# EAGLE board SparkFun_TPL5110_Breakout-Panel (EAGLE 9.4.0), part 1 of 5
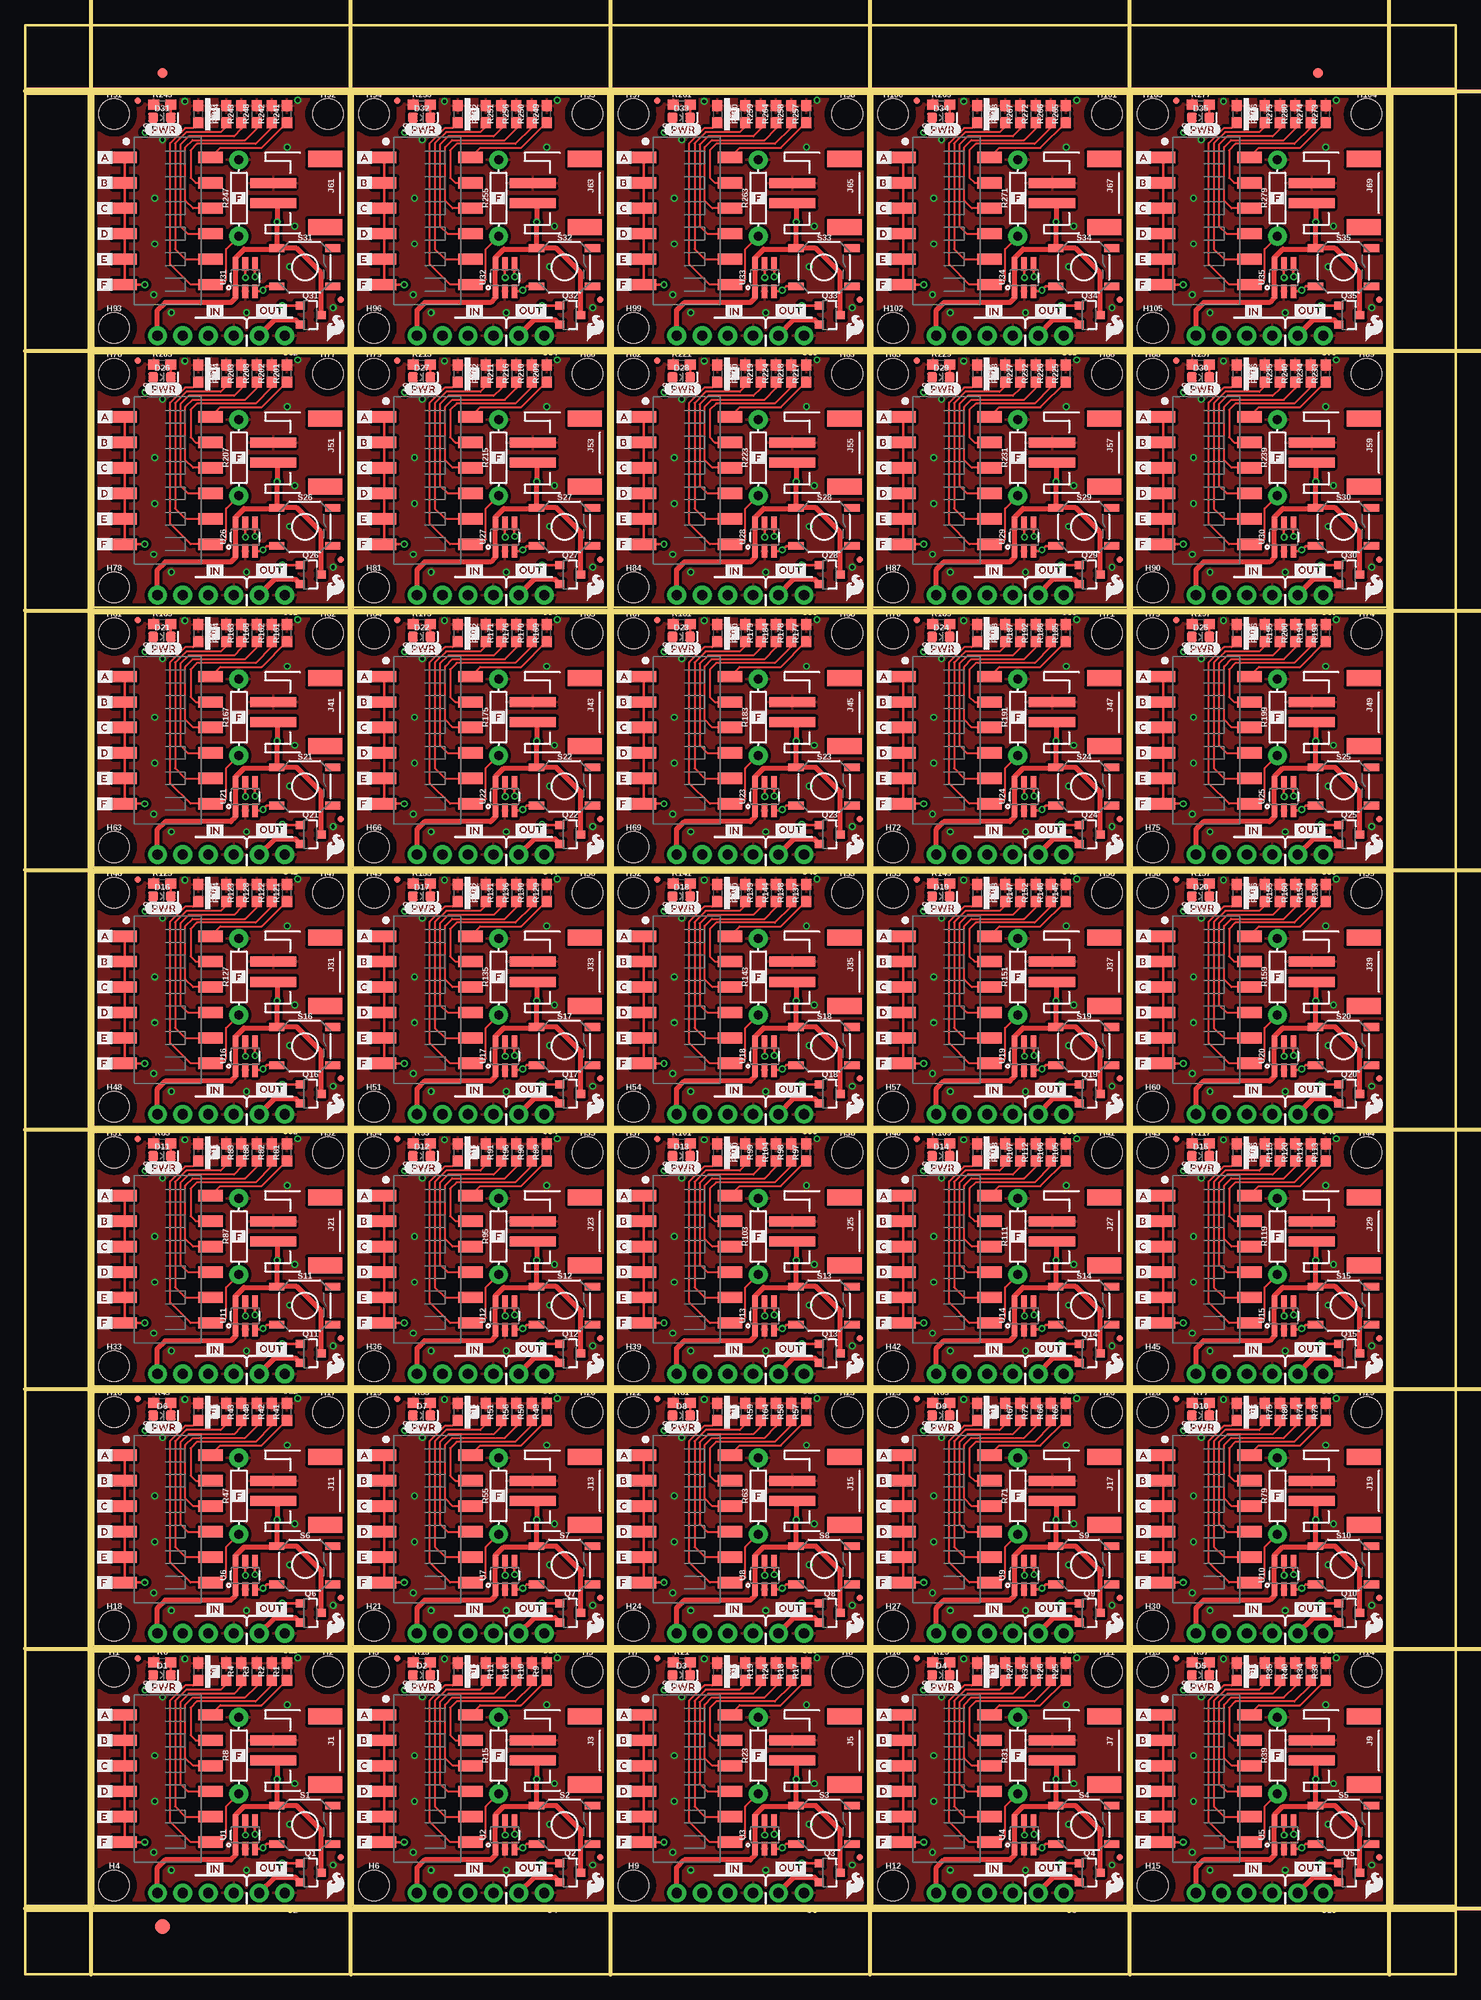
[diagram p0: board, top side]
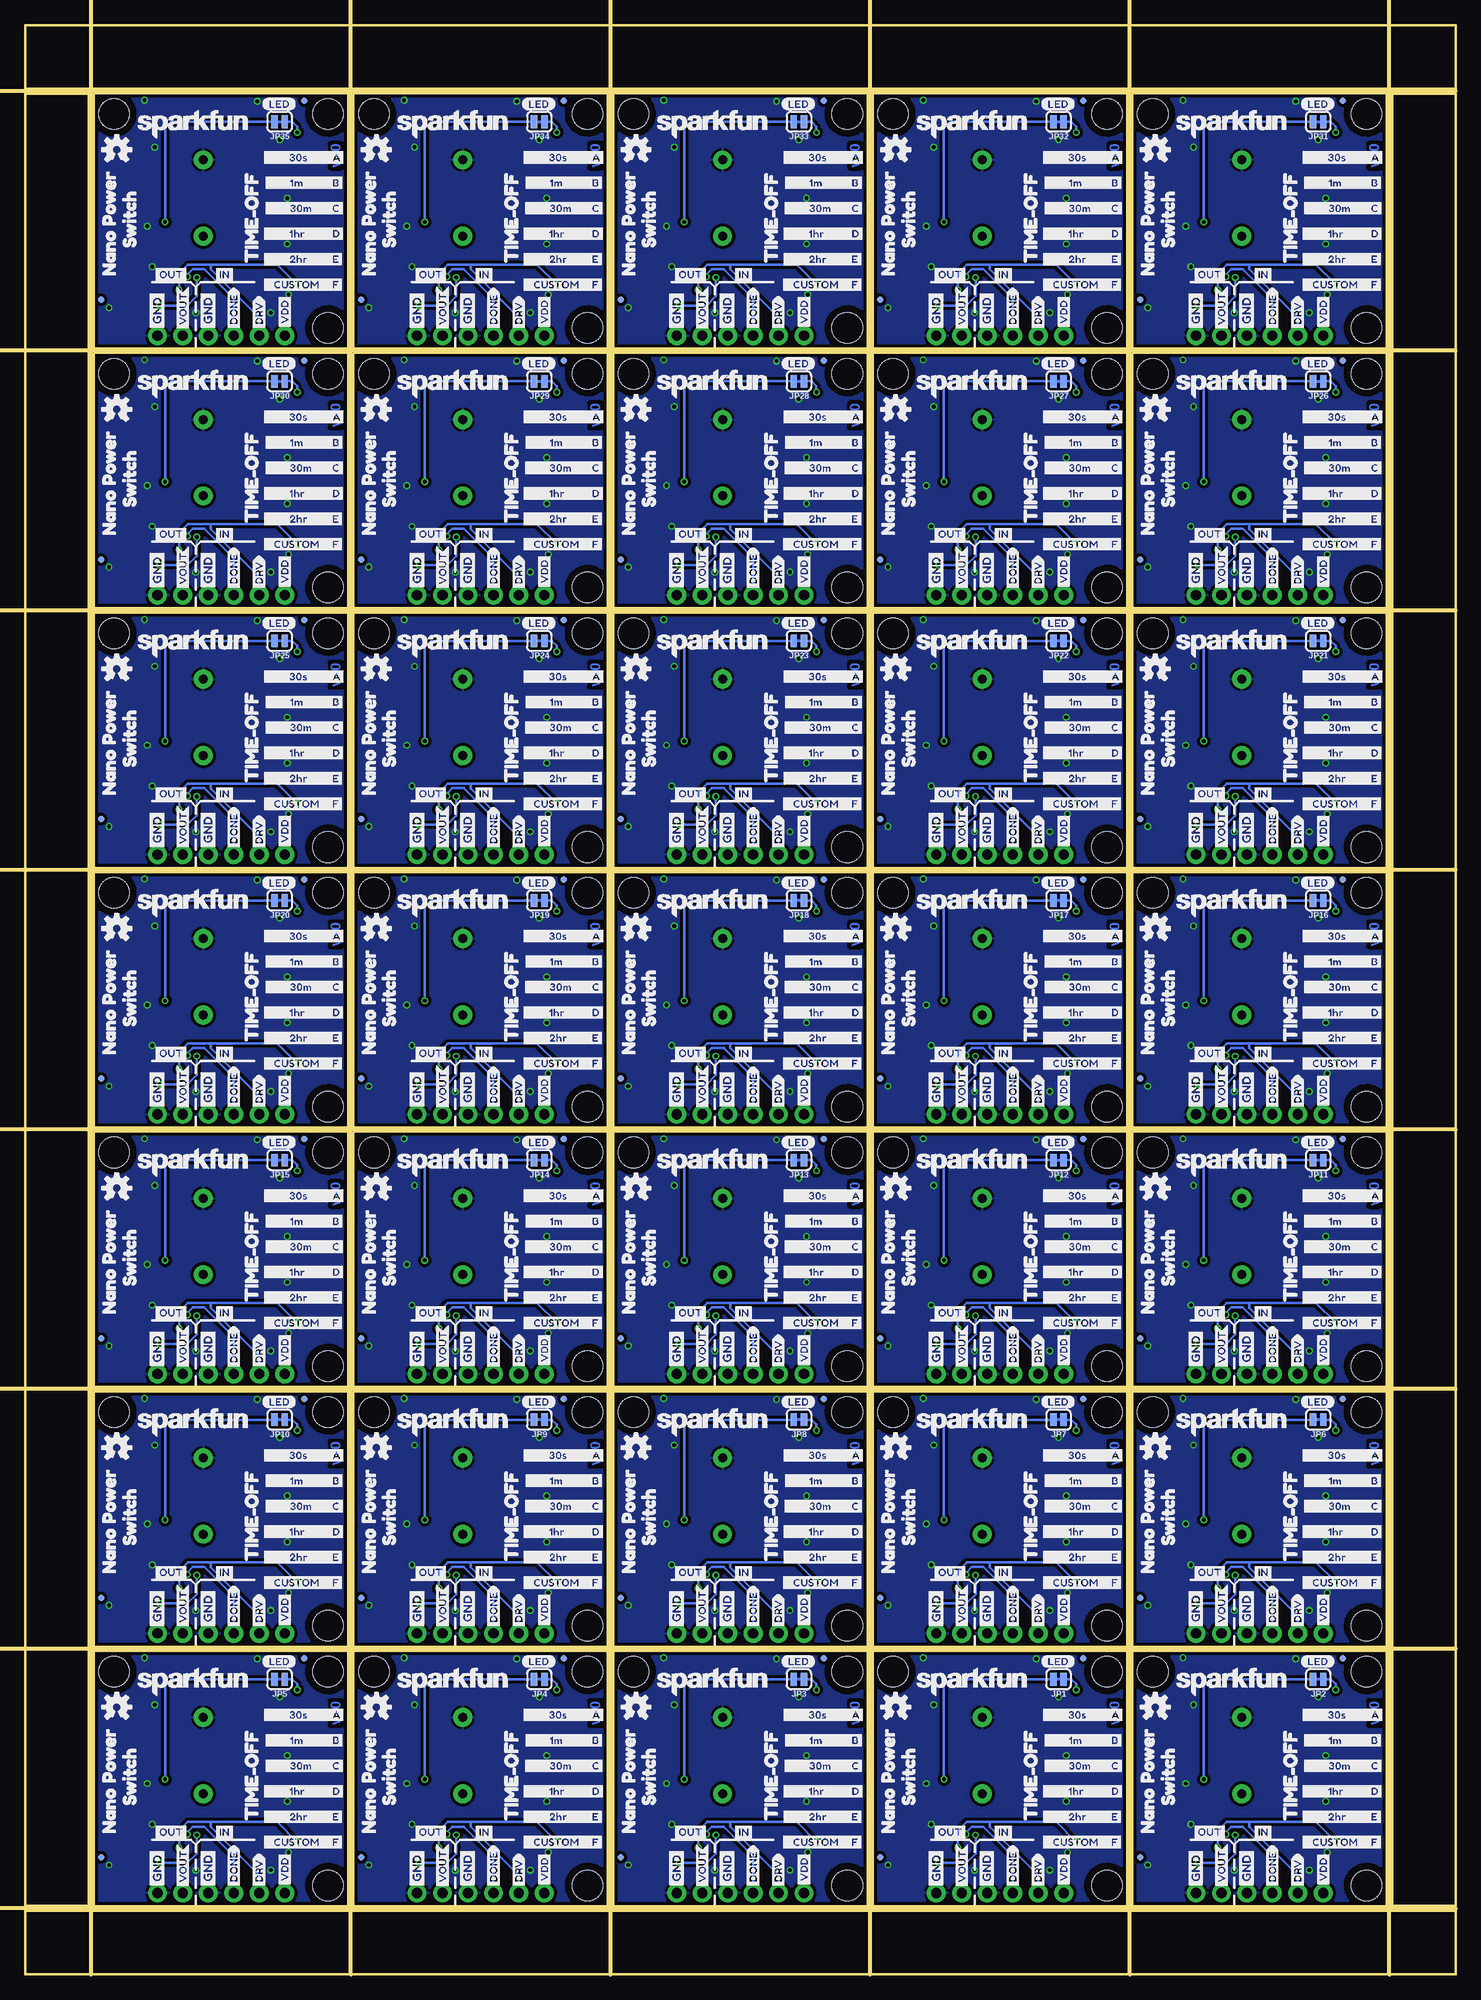
[diagram p1: board, bottom side, seen from below]

Size 142.75 x 194.56 mm. Coordinates in mm from the lower left corner, seen from the top.
Outline: 6.86,6.86 6.86,32.26 32.26,32.26 32.26,6.86 6.86,6.86
Outline: 32.77,6.86 32.77,32.26 58.17,32.26 58.17,6.86 32.77,6.86
Outline: 58.67,6.86 58.67,32.26 84.07,32.26 84.07,6.86 58.67,6.86
Outline: 84.58,6.86 84.58,32.26 109.98,32.26 109.98,6.86 84.58,6.86
Outline: 110.49,6.86 110.49,32.26 135.89,32.26 135.89,6.86 110.49,6.86
Outline: 6.86,32.77 6.86,58.17 32.26,58.17 32.26,32.77 6.86,32.77
Outline: 32.77,32.77 32.77,58.17 58.17,58.17 58.17,32.77 32.77,32.77
Outline: 58.67,32.77 58.67,58.17 84.07,58.17 84.07,32.77 58.67,32.77
Outline: 84.58,32.77 84.58,58.17 109.98,58.17 109.98,32.77 84.58,32.77
Outline: 110.49,32.77 110.49,58.17 135.89,58.17 135.89,32.77 110.49,32.77
Outline: 6.86,58.67 6.86,84.07 32.26,84.07 32.26,58.67 6.86,58.67
Outline: 32.77,58.67 32.77,84.07 58.17,84.07 58.17,58.67 32.77,58.67
Outline: 58.67,58.67 58.67,84.07 84.07,84.07 84.07,58.67 58.67,58.67
Outline: 84.58,58.67 84.58,84.07 109.98,84.07 109.98,58.67 84.58,58.67
Outline: 110.49,58.67 110.49,84.07 135.89,84.07 135.89,58.67 110.49,58.67
Outline: 6.86,84.58 6.86,109.98 32.26,109.98 32.26,84.58 6.86,84.58
Outline: 32.77,84.58 32.77,109.98 58.17,109.98 58.17,84.58 32.77,84.58
Outline: 58.67,84.58 58.67,109.98 84.07,109.98 84.07,84.58 58.67,84.58
Outline: 84.58,84.58 84.58,109.98 109.98,109.98 109.98,84.58 84.58,84.58
Outline: 110.49,84.58 110.49,109.98 135.89,109.98 135.89,84.58 110.49,84.58
Outline: 6.86,110.49 6.86,135.89 32.26,135.89 32.26,110.49 6.86,110.49
Outline: 32.77,110.49 32.77,135.89 58.17,135.89 58.17,110.49 32.77,110.49
Outline: 58.67,110.49 58.67,135.89 84.07,135.89 84.07,110.49 58.67,110.49
Outline: 84.58,110.49 84.58,135.89 109.98,135.89 109.98,110.49 84.58,110.49
Outline: 110.49,110.49 110.49,135.89 135.89,135.89 135.89,110.49 110.49,110.49
Outline: 6.86,136.4 6.86,161.8 32.26,161.8 32.26,136.4 6.86,136.4
Outline: 32.77,136.4 32.77,161.8 58.17,161.8 58.17,136.4 32.77,136.4
Outline: 58.67,136.4 58.67,161.8 84.07,161.8 84.07,136.4 58.67,136.4
Outline: 84.58,136.4 84.58,161.8 109.98,161.8 109.98,136.4 84.58,136.4
Outline: 110.49,136.4 110.49,161.8 135.89,161.8 135.89,136.4 110.49,136.4
Outline: 6.86,162.31 6.86,187.71 32.26,187.71 32.26,162.31 6.86,162.31
Outline: 32.77,162.31 32.77,187.71 58.17,187.71 58.17,162.31 32.77,162.31
Outline: 58.67,162.31 58.67,187.71 84.07,187.71 84.07,162.31 58.67,162.31
Outline: 84.58,162.31 84.58,187.71 109.98,187.71 109.98,162.31 84.58,162.31
Outline: 110.49,162.31 110.49,187.71 135.89,187.71 135.89,162.31 110.49,162.31
Outline: 0,6.35 142.75,6.35 142.75,0 0,0 0,6.35
Outline: 136.4,187.71 142.75,187.71 142.75,6.86 136.4,6.86 136.4,187.71
Outline: 0,194.56 142.75,194.56 142.75,188.21 0,188.21 0,194.56
Outline: 0,187.71 6.35,187.71 6.35,6.86 0,6.86 0,187.71
Copper layers (1*16): Top 0.035mm / dielectric 1.5mm / Bottom 0.035mm
Design rules "SparkFun-2-layer-PCBWay-LIMIT": minimum track width 6mil, minimum drill 0.3mm, track to track 6mil, track to pad 6mil, pad to pad 6mil, via to via 6mil, smd to smd 6mil, copper to edge 6mil, drill to drill 6mil, minimum pad ring 6mil, minimum via ring 6mil, stop-mask expansion 4mil, vias tented up to drill 25mil, thermal gap 10mil
Milling: 14 lines

## Footprints (pad centres in the part's own frame; a part is rotated, then mirrored left to right if it is on the bottom)
LED-0603 = smd 1 x 1: A -0.877,0; C 0.877,0
FIDUCIAL-1X2 = smd 1 x 1: 1 0,0
FIDUCIAL-1.5X3 = smd 1.5 x 1.5: 1 0,0
FIDUCIAL-MICRO = smd 0.635 x 0.635: 1 0,0
STAND-OFF-TIGHT = hole 3.048: 0,0
JST-2-SMD = smd 1 x 4.6: 1 -1,-3.7; 2 1,-3.7 | smd 1.6 x 3.4: NC1 -3.4,1.5; NC2 3.4,1.5
1X06_NO_SILK = drill 1.016 pad 1.88: 1 0,0; 2 2.54,0; 3 5.08,0; 4 7.62,0; 5 10.16,0; 6 12.7,0
SMT-JUMPER_2_NC_TRACE_SILK = smd 0.635 x 1.27: 1 -0.508,0; 2 0.508,0
SOT23-3 = smd 0.8 x 0.9: 1 -0.95,-1; 2 0.95,-1; 3 0,1.1
0603 = smd 1.1 x 1: 1 -0.85,0; 2 0.85,0
AXIAL-0.3 = drill 0.9 pad 1.88: P$1 -3.81,0; P$2 3.81,0
TACTILE_SWITCH_SMD_5.2MM = smd 1.524 x 0.762: 1 -2.794,1.905; 2 2.794,1.905; 3 -2.794,-1.905; 4 2.794,-1.905
DIPSWITCH-06-SMD = smd 1.13 x 2.44: 1 -6.35,-4.3; 2 -3.81,-4.3; 3 -1.27,-4.3; 4 1.27,-4.3; 5 3.81,-4.3; 6 6.35,-4.3; 7 6.35,4.3; 8 3.81,4.3; 9 1.27,4.3; 10 -1.27,4.3; 11 -3.81,4.3; 12 -6.35,4.3
SOT23-6 = smd 0.55 x 1.35: 1 -0.95,-1.375; 2 0,-1.375; 3 0.95,-1.375; 4 0.95,1.375; 5 0,1.375; 6 -0.95,1.375

## Placement (x,y rotation side)
D1  RED  [LED-0603]  13.67,29.87 0 top
D2  RED  [LED-0603]  39.57,29.87 0 top
D3  RED  [LED-0603]  65.48,29.87 0 top
D4  RED  [LED-0603]  91.39,29.87 0 top
D5  RED  [LED-0603]  117.3,29.87 0 top
D6  RED  [LED-0603]  13.67,55.78 0 top
D7  RED  [LED-0603]  39.57,55.78 0 top
D8  RED  [LED-0603]  65.48,55.78 0 top
D9  RED  [LED-0603]  91.39,55.78 0 top
D10  RED  [LED-0603]  117.3,55.78 0 top
D11  RED  [LED-0603]  13.67,81.69 0 top
D12  RED  [LED-0603]  39.57,81.69 0 top
D13  RED  [LED-0603]  65.48,81.69 0 top
D14  RED  [LED-0603]  91.39,81.69 0 top
D15  RED  [LED-0603]  117.3,81.69 0 top
D16  RED  [LED-0603]  13.67,107.59 0 top
D17  RED  [LED-0603]  39.57,107.59 0 top
D18  RED  [LED-0603]  65.48,107.59 0 top
D19  RED  [LED-0603]  91.39,107.59 0 top
D20  RED  [LED-0603]  117.3,107.59 0 top
D21  RED  [LED-0603]  13.67,133.5 0 top
D22  RED  [LED-0603]  39.57,133.5 0 top
D23  RED  [LED-0603]  65.48,133.5 0 top
D24  RED  [LED-0603]  91.39,133.5 0 top
D25  RED  [LED-0603]  117.3,133.5 0 top
D26  RED  [LED-0603]  13.67,159.41 0 top
D27  RED  [LED-0603]  39.57,159.41 0 top
D28  RED  [LED-0603]  65.48,159.41 0 top
D29  RED  [LED-0603]  91.39,159.41 0 top
D30  RED  [LED-0603]  117.3,159.41 0 top
D31  RED  [LED-0603]  13.67,185.32 0 top
D32  RED  [LED-0603]  39.57,185.32 0 top
D33  RED  [LED-0603]  65.48,185.32 0 top
D34  RED  [LED-0603]  91.39,185.32 0 top
D35  RED  [LED-0603]  117.3,185.32 0 top
E$1  [FIDUCIAL-1X2]  13.72,189.8 0 top
E$2  [FIDUCIAL-1X2]  129.03,189.8 0 top
E$3  [FIDUCIAL-1.5X3]  13.72,4.76 0 top
FD1  FIDUCIALUFIDUCIAL  [FIDUCIAL-MICRO]  11.25,31.55 0 bottom
FD2  FIDUCIALUFIDUCIAL  [FIDUCIAL-MICRO]  11.25,31.55 0 top
FD3  FIDUCIALUFIDUCIAL  [FIDUCIAL-MICRO]  31.5,11.68 0 bottom
FD4  FIDUCIALUFIDUCIAL  [FIDUCIAL-MICRO]  31.5,11.68 0 top
FD5  FIDUCIALUFIDUCIAL  [FIDUCIAL-MICRO]  37.16,31.55 0 bottom
FD6  FIDUCIALUFIDUCIAL  [FIDUCIAL-MICRO]  37.16,31.55 0 top
FD7  FIDUCIALUFIDUCIAL  [FIDUCIAL-MICRO]  57.4,11.68 0 bottom
FD8  FIDUCIALUFIDUCIAL  [FIDUCIAL-MICRO]  57.4,11.68 0 top
FD9  FIDUCIALUFIDUCIAL  [FIDUCIAL-MICRO]  63.07,31.55 0 bottom
FD10  FIDUCIALUFIDUCIAL  [FIDUCIAL-MICRO]  63.07,31.55 0 top
FD11  FIDUCIALUFIDUCIAL  [FIDUCIAL-MICRO]  83.31,11.68 0 bottom
FD12  FIDUCIALUFIDUCIAL  [FIDUCIAL-MICRO]  83.31,11.68 0 top
FD13  FIDUCIALUFIDUCIAL  [FIDUCIAL-MICRO]  88.98,31.55 0 bottom
FD14  FIDUCIALUFIDUCIAL  [FIDUCIAL-MICRO]  88.98,31.55 0 top
FD15  FIDUCIALUFIDUCIAL  [FIDUCIAL-MICRO]  109.22,11.68 0 bottom
FD16  FIDUCIALUFIDUCIAL  [FIDUCIAL-MICRO]  109.22,11.68 0 top
FD17  FIDUCIALUFIDUCIAL  [FIDUCIAL-MICRO]  114.88,31.55 0 bottom
FD18  FIDUCIALUFIDUCIAL  [FIDUCIAL-MICRO]  114.88,31.55 0 top
FD19  FIDUCIALUFIDUCIAL  [FIDUCIAL-MICRO]  135.13,11.68 0 bottom
FD20  FIDUCIALUFIDUCIAL  [FIDUCIAL-MICRO]  135.13,11.68 0 top
FD21  FIDUCIALUFIDUCIAL  [FIDUCIAL-MICRO]  11.25,57.45 0 bottom
FD22  FIDUCIALUFIDUCIAL  [FIDUCIAL-MICRO]  11.25,57.45 0 top
FD23  FIDUCIALUFIDUCIAL  [FIDUCIAL-MICRO]  31.5,37.59 0 bottom
FD24  FIDUCIALUFIDUCIAL  [FIDUCIAL-MICRO]  31.5,37.59 0 top
FD25  FIDUCIALUFIDUCIAL  [FIDUCIAL-MICRO]  37.16,57.45 0 bottom
FD26  FIDUCIALUFIDUCIAL  [FIDUCIAL-MICRO]  37.16,57.45 0 top
FD27  FIDUCIALUFIDUCIAL  [FIDUCIAL-MICRO]  57.4,37.59 0 bottom
FD28  FIDUCIALUFIDUCIAL  [FIDUCIAL-MICRO]  57.4,37.59 0 top
FD29  FIDUCIALUFIDUCIAL  [FIDUCIAL-MICRO]  63.07,57.45 0 bottom
FD30  FIDUCIALUFIDUCIAL  [FIDUCIAL-MICRO]  63.07,57.45 0 top
FD31  FIDUCIALUFIDUCIAL  [FIDUCIAL-MICRO]  83.31,37.59 0 bottom
FD32  FIDUCIALUFIDUCIAL  [FIDUCIAL-MICRO]  83.31,37.59 0 top
FD33  FIDUCIALUFIDUCIAL  [FIDUCIAL-MICRO]  88.98,57.45 0 bottom
FD34  FIDUCIALUFIDUCIAL  [FIDUCIAL-MICRO]  88.98,57.45 0 top
FD35  FIDUCIALUFIDUCIAL  [FIDUCIAL-MICRO]  109.22,37.59 0 bottom
FD36  FIDUCIALUFIDUCIAL  [FIDUCIAL-MICRO]  109.22,37.59 0 top
FD37  FIDUCIALUFIDUCIAL  [FIDUCIAL-MICRO]  114.88,57.45 0 bottom
FD38  FIDUCIALUFIDUCIAL  [FIDUCIAL-MICRO]  114.88,57.45 0 top
FD39  FIDUCIALUFIDUCIAL  [FIDUCIAL-MICRO]  135.13,37.59 0 bottom
FD40  FIDUCIALUFIDUCIAL  [FIDUCIAL-MICRO]  135.13,37.59 0 top
FD41  FIDUCIALUFIDUCIAL  [FIDUCIAL-MICRO]  11.25,83.36 0 bottom
FD42  FIDUCIALUFIDUCIAL  [FIDUCIAL-MICRO]  11.25,83.36 0 top
FD43  FIDUCIALUFIDUCIAL  [FIDUCIAL-MICRO]  31.5,63.5 0 bottom
FD44  FIDUCIALUFIDUCIAL  [FIDUCIAL-MICRO]  31.5,63.5 0 top
FD45  FIDUCIALUFIDUCIAL  [FIDUCIAL-MICRO]  37.16,83.36 0 bottom
FD46  FIDUCIALUFIDUCIAL  [FIDUCIAL-MICRO]  37.16,83.36 0 top
FD47  FIDUCIALUFIDUCIAL  [FIDUCIAL-MICRO]  57.4,63.5 0 bottom
FD48  FIDUCIALUFIDUCIAL  [FIDUCIAL-MICRO]  57.4,63.5 0 top
FD49  FIDUCIALUFIDUCIAL  [FIDUCIAL-MICRO]  63.07,83.36 0 bottom
FD50  FIDUCIALUFIDUCIAL  [FIDUCIAL-MICRO]  63.07,83.36 0 top
FD51  FIDUCIALUFIDUCIAL  [FIDUCIAL-MICRO]  83.31,63.5 0 bottom
FD52  FIDUCIALUFIDUCIAL  [FIDUCIAL-MICRO]  83.31,63.5 0 top
FD53  FIDUCIALUFIDUCIAL  [FIDUCIAL-MICRO]  88.98,83.36 0 bottom
FD54  FIDUCIALUFIDUCIAL  [FIDUCIAL-MICRO]  88.98,83.36 0 top
FD55  FIDUCIALUFIDUCIAL  [FIDUCIAL-MICRO]  109.22,63.5 0 bottom
FD56  FIDUCIALUFIDUCIAL  [FIDUCIAL-MICRO]  109.22,63.5 0 top
FD57  FIDUCIALUFIDUCIAL  [FIDUCIAL-MICRO]  114.88,83.36 0 bottom
FD58  FIDUCIALUFIDUCIAL  [FIDUCIAL-MICRO]  114.88,83.36 0 top
FD59  FIDUCIALUFIDUCIAL  [FIDUCIAL-MICRO]  135.13,63.5 0 bottom
FD60  FIDUCIALUFIDUCIAL  [FIDUCIAL-MICRO]  135.13,63.5 0 top
FD61  FIDUCIALUFIDUCIAL  [FIDUCIAL-MICRO]  11.25,109.27 0 bottom
FD62  FIDUCIALUFIDUCIAL  [FIDUCIAL-MICRO]  11.25,109.27 0 top
FD63  FIDUCIALUFIDUCIAL  [FIDUCIAL-MICRO]  31.5,89.41 0 bottom
FD64  FIDUCIALUFIDUCIAL  [FIDUCIAL-MICRO]  31.5,89.41 0 top
FD65  FIDUCIALUFIDUCIAL  [FIDUCIAL-MICRO]  37.16,109.27 0 bottom
FD66  FIDUCIALUFIDUCIAL  [FIDUCIAL-MICRO]  37.16,109.27 0 top
FD67  FIDUCIALUFIDUCIAL  [FIDUCIAL-MICRO]  57.4,89.41 0 bottom
FD68  FIDUCIALUFIDUCIAL  [FIDUCIAL-MICRO]  57.4,89.41 0 top
FD69  FIDUCIALUFIDUCIAL  [FIDUCIAL-MICRO]  63.07,109.27 0 bottom
FD70  FIDUCIALUFIDUCIAL  [FIDUCIAL-MICRO]  63.07,109.27 0 top
FD71  FIDUCIALUFIDUCIAL  [FIDUCIAL-MICRO]  83.31,89.41 0 bottom
FD72  FIDUCIALUFIDUCIAL  [FIDUCIAL-MICRO]  83.31,89.41 0 top
FD73  FIDUCIALUFIDUCIAL  [FIDUCIAL-MICRO]  88.98,109.27 0 bottom
FD74  FIDUCIALUFIDUCIAL  [FIDUCIAL-MICRO]  88.98,109.27 0 top
FD75  FIDUCIALUFIDUCIAL  [FIDUCIAL-MICRO]  109.22,89.41 0 bottom
FD76  FIDUCIALUFIDUCIAL  [FIDUCIAL-MICRO]  109.22,89.41 0 top
FD77  FIDUCIALUFIDUCIAL  [FIDUCIAL-MICRO]  114.88,109.27 0 bottom
FD78  FIDUCIALUFIDUCIAL  [FIDUCIAL-MICRO]  114.88,109.27 0 top
FD79  FIDUCIALUFIDUCIAL  [FIDUCIAL-MICRO]  135.13,89.41 0 bottom
FD80  FIDUCIALUFIDUCIAL  [FIDUCIAL-MICRO]  135.13,89.41 0 top
FD81  FIDUCIALUFIDUCIAL  [FIDUCIAL-MICRO]  11.25,135.18 0 bottom
FD82  FIDUCIALUFIDUCIAL  [FIDUCIAL-MICRO]  11.25,135.18 0 top
FD83  FIDUCIALUFIDUCIAL  [FIDUCIAL-MICRO]  31.5,115.32 0 bottom
FD84  FIDUCIALUFIDUCIAL  [FIDUCIAL-MICRO]  31.5,115.32 0 top
FD85  FIDUCIALUFIDUCIAL  [FIDUCIAL-MICRO]  37.16,135.18 0 bottom
FD86  FIDUCIALUFIDUCIAL  [FIDUCIAL-MICRO]  37.16,135.18 0 top
FD87  FIDUCIALUFIDUCIAL  [FIDUCIAL-MICRO]  57.4,115.32 0 bottom
FD88  FIDUCIALUFIDUCIAL  [FIDUCIAL-MICRO]  57.4,115.32 0 top
FD89  FIDUCIALUFIDUCIAL  [FIDUCIAL-MICRO]  63.07,135.18 0 bottom
FD90  FIDUCIALUFIDUCIAL  [FIDUCIAL-MICRO]  63.07,135.18 0 top
FD91  FIDUCIALUFIDUCIAL  [FIDUCIAL-MICRO]  83.31,115.32 0 bottom
FD92  FIDUCIALUFIDUCIAL  [FIDUCIAL-MICRO]  83.31,115.32 0 top
FD93  FIDUCIALUFIDUCIAL  [FIDUCIAL-MICRO]  88.98,135.18 0 bottom
FD94  FIDUCIALUFIDUCIAL  [FIDUCIAL-MICRO]  88.98,135.18 0 top
FD95  FIDUCIALUFIDUCIAL  [FIDUCIAL-MICRO]  109.22,115.32 0 bottom
FD96  FIDUCIALUFIDUCIAL  [FIDUCIAL-MICRO]  109.22,115.32 0 top
FD97  FIDUCIALUFIDUCIAL  [FIDUCIAL-MICRO]  114.88,135.18 0 bottom
FD98  FIDUCIALUFIDUCIAL  [FIDUCIAL-MICRO]  114.88,135.18 0 top
FD99  FIDUCIALUFIDUCIAL  [FIDUCIAL-MICRO]  135.13,115.32 0 bottom
FD100  FIDUCIALUFIDUCIAL  [FIDUCIAL-MICRO]  135.13,115.32 0 top
FD101  FIDUCIALUFIDUCIAL  [FIDUCIAL-MICRO]  11.25,161.09 0 bottom
FD102  FIDUCIALUFIDUCIAL  [FIDUCIAL-MICRO]  11.25,161.09 0 top
FD103  FIDUCIALUFIDUCIAL  [FIDUCIAL-MICRO]  31.5,141.22 0 bottom
FD104  FIDUCIALUFIDUCIAL  [FIDUCIAL-MICRO]  31.5,141.22 0 top
FD105  FIDUCIALUFIDUCIAL  [FIDUCIAL-MICRO]  37.16,161.09 0 bottom
FD106  FIDUCIALUFIDUCIAL  [FIDUCIAL-MICRO]  37.16,161.09 0 top
FD107  FIDUCIALUFIDUCIAL  [FIDUCIAL-MICRO]  57.4,141.22 0 bottom
FD108  FIDUCIALUFIDUCIAL  [FIDUCIAL-MICRO]  57.4,141.22 0 top
FD109  FIDUCIALUFIDUCIAL  [FIDUCIAL-MICRO]  63.07,161.09 0 bottom
FD110  FIDUCIALUFIDUCIAL  [FIDUCIAL-MICRO]  63.07,161.09 0 top
FD111  FIDUCIALUFIDUCIAL  [FIDUCIAL-MICRO]  83.31,141.22 0 bottom
FD112  FIDUCIALUFIDUCIAL  [FIDUCIAL-MICRO]  83.31,141.22 0 top
FD113  FIDUCIALUFIDUCIAL  [FIDUCIAL-MICRO]  88.98,161.09 0 bottom
FD114  FIDUCIALUFIDUCIAL  [FIDUCIAL-MICRO]  88.98,161.09 0 top
FD115  FIDUCIALUFIDUCIAL  [FIDUCIAL-MICRO]  109.22,141.22 0 bottom
FD116  FIDUCIALUFIDUCIAL  [FIDUCIAL-MICRO]  109.22,141.22 0 top
FD117  FIDUCIALUFIDUCIAL  [FIDUCIAL-MICRO]  114.88,161.09 0 bottom
FD118  FIDUCIALUFIDUCIAL  [FIDUCIAL-MICRO]  114.88,161.09 0 top
FD119  FIDUCIALUFIDUCIAL  [FIDUCIAL-MICRO]  135.13,141.22 0 bottom
FD120  FIDUCIALUFIDUCIAL  [FIDUCIAL-MICRO]  135.13,141.22 0 top
FD121  FIDUCIALUFIDUCIAL  [FIDUCIAL-MICRO]  11.25,186.99 0 bottom
FD122  FIDUCIALUFIDUCIAL  [FIDUCIAL-MICRO]  11.25,186.99 0 top
FD123  FIDUCIALUFIDUCIAL  [FIDUCIAL-MICRO]  31.5,167.13 0 bottom
FD124  FIDUCIALUFIDUCIAL  [FIDUCIAL-MICRO]  31.5,167.13 0 top
FD125  FIDUCIALUFIDUCIAL  [FIDUCIAL-MICRO]  37.16,186.99 0 bottom
FD126  FIDUCIALUFIDUCIAL  [FIDUCIAL-MICRO]  37.16,186.99 0 top
FD127  FIDUCIALUFIDUCIAL  [FIDUCIAL-MICRO]  57.4,167.13 0 bottom
FD128  FIDUCIALUFIDUCIAL  [FIDUCIAL-MICRO]  57.4,167.13 0 top
FD129  FIDUCIALUFIDUCIAL  [FIDUCIAL-MICRO]  63.07,186.99 0 bottom
FD130  FIDUCIALUFIDUCIAL  [FIDUCIAL-MICRO]  63.07,186.99 0 top
FD131  FIDUCIALUFIDUCIAL  [FIDUCIAL-MICRO]  83.31,167.13 0 bottom
FD132  FIDUCIALUFIDUCIAL  [FIDUCIAL-MICRO]  83.31,167.13 0 top
FD133  FIDUCIALUFIDUCIAL  [FIDUCIAL-MICRO]  88.98,186.99 0 bottom
FD134  FIDUCIALUFIDUCIAL  [FIDUCIAL-MICRO]  88.98,186.99 0 top
FD135  FIDUCIALUFIDUCIAL  [FIDUCIAL-MICRO]  109.22,167.13 0 bottom
FD136  FIDUCIALUFIDUCIAL  [FIDUCIAL-MICRO]  109.22,167.13 0 top
FD137  FIDUCIALUFIDUCIAL  [FIDUCIAL-MICRO]  114.88,186.99 0 bottom
FD138  FIDUCIALUFIDUCIAL  [FIDUCIAL-MICRO]  114.88,186.99 0 top
FD139  FIDUCIALUFIDUCIAL  [FIDUCIAL-MICRO]  135.13,167.13 0 bottom
FD140  FIDUCIALUFIDUCIAL  [FIDUCIAL-MICRO]  135.13,167.13 0 top
H1  STAND-OFFTIGHT  [STAND-OFF-TIGHT]  8.89,30.23 0 top
H2  STAND-OFFTIGHT  [STAND-OFF-TIGHT]  30.23,30.23 0 top
H3  STAND-OFFTIGHT  [STAND-OFF-TIGHT]  34.8,30.23 0 top
H4  STAND-OFFTIGHT  [STAND-OFF-TIGHT]  8.89,8.89 0 top
H5  STAND-OFFTIGHT  [STAND-OFF-TIGHT]  56.13,30.23 0 top
H6  STAND-OFFTIGHT  [STAND-OFF-TIGHT]  34.8,8.89 0 top
H7  STAND-OFFTIGHT  [STAND-OFF-TIGHT]  60.71,30.23 0 top
H8  STAND-OFFTIGHT  [STAND-OFF-TIGHT]  82.04,30.23 0 top
H9  STAND-OFFTIGHT  [STAND-OFF-TIGHT]  60.71,8.89 0 top
H10  STAND-OFFTIGHT  [STAND-OFF-TIGHT]  86.61,30.23 0 top
H11  STAND-OFFTIGHT  [STAND-OFF-TIGHT]  107.95,30.23 0 top
H12  STAND-OFFTIGHT  [STAND-OFF-TIGHT]  86.61,8.89 0 top
H13  STAND-OFFTIGHT  [STAND-OFF-TIGHT]  112.52,30.23 0 top
H14  STAND-OFFTIGHT  [STAND-OFF-TIGHT]  133.86,30.23 0 top
H15  STAND-OFFTIGHT  [STAND-OFF-TIGHT]  112.52,8.89 0 top
H16  STAND-OFFTIGHT  [STAND-OFF-TIGHT]  8.89,56.13 0 top
H17  STAND-OFFTIGHT  [STAND-OFF-TIGHT]  30.23,56.13 0 top
H18  STAND-OFFTIGHT  [STAND-OFF-TIGHT]  8.89,34.8 0 top
H19  STAND-OFFTIGHT  [STAND-OFF-TIGHT]  34.8,56.13 0 top
H20  STAND-OFFTIGHT  [STAND-OFF-TIGHT]  56.13,56.13 0 top
H21  STAND-OFFTIGHT  [STAND-OFF-TIGHT]  34.8,34.8 0 top
H22  STAND-OFFTIGHT  [STAND-OFF-TIGHT]  60.71,56.13 0 top
H23  STAND-OFFTIGHT  [STAND-OFF-TIGHT]  82.04,56.13 0 top
H24  STAND-OFFTIGHT  [STAND-OFF-TIGHT]  60.71,34.8 0 top
H25  STAND-OFFTIGHT  [STAND-OFF-TIGHT]  86.61,56.13 0 top
H26  STAND-OFFTIGHT  [STAND-OFF-TIGHT]  107.95,56.13 0 top
H27  STAND-OFFTIGHT  [STAND-OFF-TIGHT]  86.61,34.8 0 top
H28  STAND-OFFTIGHT  [STAND-OFF-TIGHT]  112.52,56.13 0 top
H29  STAND-OFFTIGHT  [STAND-OFF-TIGHT]  133.86,56.13 0 top
H30  STAND-OFFTIGHT  [STAND-OFF-TIGHT]  112.52,34.8 0 top
H31  STAND-OFFTIGHT  [STAND-OFF-TIGHT]  8.89,82.04 0 top
H32  STAND-OFFTIGHT  [STAND-OFF-TIGHT]  30.23,82.04 0 top
H33  STAND-OFFTIGHT  [STAND-OFF-TIGHT]  8.89,60.71 0 top
H34  STAND-OFFTIGHT  [STAND-OFF-TIGHT]  34.8,82.04 0 top
H35  STAND-OFFTIGHT  [STAND-OFF-TIGHT]  56.13,82.04 0 top
H36  STAND-OFFTIGHT  [STAND-OFF-TIGHT]  34.8,60.71 0 top
H37  STAND-OFFTIGHT  [STAND-OFF-TIGHT]  60.71,82.04 0 top
H38  STAND-OFFTIGHT  [STAND-OFF-TIGHT]  82.04,82.04 0 top
H39  STAND-OFFTIGHT  [STAND-OFF-TIGHT]  60.71,60.71 0 top
H40  STAND-OFFTIGHT  [STAND-OFF-TIGHT]  86.61,82.04 0 top
H41  STAND-OFFTIGHT  [STAND-OFF-TIGHT]  107.95,82.04 0 top
H42  STAND-OFFTIGHT  [STAND-OFF-TIGHT]  86.61,60.71 0 top
H43  STAND-OFFTIGHT  [STAND-OFF-TIGHT]  112.52,82.04 0 top
H44  STAND-OFFTIGHT  [STAND-OFF-TIGHT]  133.86,82.04 0 top
H45  STAND-OFFTIGHT  [STAND-OFF-TIGHT]  112.52,60.71 0 top
H46  STAND-OFFTIGHT  [STAND-OFF-TIGHT]  8.89,107.95 0 top
H47  STAND-OFFTIGHT  [STAND-OFF-TIGHT]  30.23,107.95 0 top
H48  STAND-OFFTIGHT  [STAND-OFF-TIGHT]  8.89,86.61 0 top
H49  STAND-OFFTIGHT  [STAND-OFF-TIGHT]  34.8,107.95 0 top
H50  STAND-OFFTIGHT  [STAND-OFF-TIGHT]  56.13,107.95 0 top
H51  STAND-OFFTIGHT  [STAND-OFF-TIGHT]  34.8,86.61 0 top
H52  STAND-OFFTIGHT  [STAND-OFF-TIGHT]  60.71,107.95 0 top
H53  STAND-OFFTIGHT  [STAND-OFF-TIGHT]  82.04,107.95 0 top
H54  STAND-OFFTIGHT  [STAND-OFF-TIGHT]  60.71,86.61 0 top
H55  STAND-OFFTIGHT  [STAND-OFF-TIGHT]  86.61,107.95 0 top
H56  STAND-OFFTIGHT  [STAND-OFF-TIGHT]  107.95,107.95 0 top
H57  STAND-OFFTIGHT  [STAND-OFF-TIGHT]  86.61,86.61 0 top
H58  STAND-OFFTIGHT  [STAND-OFF-TIGHT]  112.52,107.95 0 top
H59  STAND-OFFTIGHT  [STAND-OFF-TIGHT]  133.86,107.95 0 top
H60  STAND-OFFTIGHT  [STAND-OFF-TIGHT]  112.52,86.61 0 top
H61  STAND-OFFTIGHT  [STAND-OFF-TIGHT]  8.89,133.86 0 top
H62  STAND-OFFTIGHT  [STAND-OFF-TIGHT]  30.23,133.86 0 top
H63  STAND-OFFTIGHT  [STAND-OFF-TIGHT]  8.89,112.52 0 top
H64  STAND-OFFTIGHT  [STAND-OFF-TIGHT]  34.8,133.86 0 top
H65  STAND-OFFTIGHT  [STAND-OFF-TIGHT]  56.13,133.86 0 top
H66  STAND-OFFTIGHT  [STAND-OFF-TIGHT]  34.8,112.52 0 top
H67  STAND-OFFTIGHT  [STAND-OFF-TIGHT]  60.71,133.86 0 top
H68  STAND-OFFTIGHT  [STAND-OFF-TIGHT]  82.04,133.86 0 top
H69  STAND-OFFTIGHT  [STAND-OFF-TIGHT]  60.71,112.52 0 top
H70  STAND-OFFTIGHT  [STAND-OFF-TIGHT]  86.61,133.86 0 top
H71  STAND-OFFTIGHT  [STAND-OFF-TIGHT]  107.95,133.86 0 top
H72  STAND-OFFTIGHT  [STAND-OFF-TIGHT]  86.61,112.52 0 top
H73  STAND-OFFTIGHT  [STAND-OFF-TIGHT]  112.52,133.86 0 top
H74  STAND-OFFTIGHT  [STAND-OFF-TIGHT]  133.86,133.86 0 top
H75  STAND-OFFTIGHT  [STAND-OFF-TIGHT]  112.52,112.52 0 top
H76  STAND-OFFTIGHT  [STAND-OFF-TIGHT]  8.89,159.77 0 top
H77  STAND-OFFTIGHT  [STAND-OFF-TIGHT]  30.23,159.77 0 top
H78  STAND-OFFTIGHT  [STAND-OFF-TIGHT]  8.89,138.43 0 top
H79  STAND-OFFTIGHT  [STAND-OFF-TIGHT]  34.8,159.77 0 top
H80  STAND-OFFTIGHT  [STAND-OFF-TIGHT]  56.13,159.77 0 top
H81  STAND-OFFTIGHT  [STAND-OFF-TIGHT]  34.8,138.43 0 top
H82  STAND-OFFTIGHT  [STAND-OFF-TIGHT]  60.71,159.77 0 top
H83  STAND-OFFTIGHT  [STAND-OFF-TIGHT]  82.04,159.77 0 top
H84  STAND-OFFTIGHT  [STAND-OFF-TIGHT]  60.71,138.43 0 top
H85  STAND-OFFTIGHT  [STAND-OFF-TIGHT]  86.61,159.77 0 top
H86  STAND-OFFTIGHT  [STAND-OFF-TIGHT]  107.95,159.77 0 top
H87  STAND-OFFTIGHT  [STAND-OFF-TIGHT]  86.61,138.43 0 top
H88  STAND-OFFTIGHT  [STAND-OFF-TIGHT]  112.52,159.77 0 top
H89  STAND-OFFTIGHT  [STAND-OFF-TIGHT]  133.86,159.77 0 top
H90  STAND-OFFTIGHT  [STAND-OFF-TIGHT]  112.52,138.43 0 top
H91  STAND-OFFTIGHT  [STAND-OFF-TIGHT]  8.89,185.67 0 top
H92  STAND-OFFTIGHT  [STAND-OFF-TIGHT]  30.23,185.67 0 top
H93  STAND-OFFTIGHT  [STAND-OFF-TIGHT]  8.89,164.34 0 top
H94  STAND-OFFTIGHT  [STAND-OFF-TIGHT]  34.8,185.67 0 top
H95  STAND-OFFTIGHT  [STAND-OFF-TIGHT]  56.13,185.67 0 top
H96  STAND-OFFTIGHT  [STAND-OFF-TIGHT]  34.8,164.34 0 top
H97  STAND-OFFTIGHT  [STAND-OFF-TIGHT]  60.71,185.67 0 top
H98  STAND-OFFTIGHT  [STAND-OFF-TIGHT]  82.04,185.67 0 top
H99  STAND-OFFTIGHT  [STAND-OFF-TIGHT]  60.71,164.34 0 top
H100  STAND-OFFTIGHT  [STAND-OFF-TIGHT]  86.61,185.67 0 top
H101  STAND-OFFTIGHT  [STAND-OFF-TIGHT]  107.95,185.67 0 top
H102  STAND-OFFTIGHT  [STAND-OFF-TIGHT]  86.61,164.34 0 top
H103  STAND-OFFTIGHT  [STAND-OFF-TIGHT]  112.52,185.67 0 top
H104  STAND-OFFTIGHT  [STAND-OFF-TIGHT]  133.86,185.67 0 top
H105  STAND-OFFTIGHT  [STAND-OFF-TIGHT]  112.52,164.34 0 top
J1  [JST-2-SMD]  28.45,22.35 270 top
J2  [1X06_NO_SILK]  25.91,8.13 180 top
J3  [JST-2-SMD]  54.36,22.35 270 top
J4  [1X06_NO_SILK]  51.82,8.13 180 top
J5  [JST-2-SMD]  80.26,22.35 270 top
J6  [1X06_NO_SILK]  77.72,8.13 180 top
J7  [JST-2-SMD]  106.17,22.35 270 top
J8  [1X06_NO_SILK]  103.63,8.13 180 top
J9  [JST-2-SMD]  132.08,22.35 270 top
J10  [1X06_NO_SILK]  129.54,8.13 180 top
J11  [JST-2-SMD]  28.45,48.26 270 top
J12  [1X06_NO_SILK]  25.91,34.04 180 top
J13  [JST-2-SMD]  54.36,48.26 270 top
J14  [1X06_NO_SILK]  51.82,34.04 180 top
J15  [JST-2-SMD]  80.26,48.26 270 top
J16  [1X06_NO_SILK]  77.72,34.04 180 top
J17  [JST-2-SMD]  106.17,48.26 270 top
J18  [1X06_NO_SILK]  103.63,34.04 180 top
J19  [JST-2-SMD]  132.08,48.26 270 top
J20  [1X06_NO_SILK]  129.54,34.04 180 top
J21  [JST-2-SMD]  28.45,74.17 270 top
J22  [1X06_NO_SILK]  25.91,59.94 180 top
J23  [JST-2-SMD]  54.36,74.17 270 top
J24  [1X06_NO_SILK]  51.82,59.94 180 top
J25  [JST-2-SMD]  80.26,74.17 270 top
J26  [1X06_NO_SILK]  77.72,59.94 180 top
J27  [JST-2-SMD]  106.17,74.17 270 top
J28  [1X06_NO_SILK]  103.63,59.94 180 top
J29  [JST-2-SMD]  132.08,74.17 270 top
J30  [1X06_NO_SILK]  129.54,59.94 180 top
J31  [JST-2-SMD]  28.45,100.08 270 top
J32  [1X06_NO_SILK]  25.91,85.85 180 top
J33  [JST-2-SMD]  54.36,100.08 270 top
J34  [1X06_NO_SILK]  51.82,85.85 180 top
J35  [JST-2-SMD]  80.26,100.08 270 top
J36  [1X06_NO_SILK]  77.72,85.85 180 top
J37  [JST-2-SMD]  106.17,100.08 270 top
J38  [1X06_NO_SILK]  103.63,85.85 180 top
J39  [JST-2-SMD]  132.08,100.08 270 top
J40  [1X06_NO_SILK]  129.54,85.85 180 top
J41  [JST-2-SMD]  28.45,125.98 270 top
J42  [1X06_NO_SILK]  25.91,111.76 180 top
J43  [JST-2-SMD]  54.36,125.98 270 top
J44  [1X06_NO_SILK]  51.82,111.76 180 top
J45  [JST-2-SMD]  80.26,125.98 270 top
J46  [1X06_NO_SILK]  77.72,111.76 180 top
J47  [JST-2-SMD]  106.17,125.98 270 top
J48  [1X06_NO_SILK]  103.63,111.76 180 top
J49  [JST-2-SMD]  132.08,125.98 270 top
J50  [1X06_NO_SILK]  129.54,111.76 180 top
J51  [JST-2-SMD]  28.45,151.89 270 top
J52  [1X06_NO_SILK]  25.91,137.67 180 top
J53  [JST-2-SMD]  54.36,151.89 270 top
J54  [1X06_NO_SILK]  51.82,137.67 180 top
J55  [JST-2-SMD]  80.26,151.89 270 top
J56  [1X06_NO_SILK]  77.72,137.67 180 top
J57  [JST-2-SMD]  106.17,151.89 270 top
J58  [1X06_NO_SILK]  103.63,137.67 180 top
J59  [JST-2-SMD]  132.08,151.89 270 top
J60  [1X06_NO_SILK]  129.54,137.67 180 top
J61  [JST-2-SMD]  28.45,177.8 270 top
J62  [1X06_NO_SILK]  25.91,163.58 180 top
J63  [JST-2-SMD]  54.36,177.8 270 top
J64  [1X06_NO_SILK]  51.82,163.58 180 top
J65  [JST-2-SMD]  80.26,177.8 270 top
J66  [1X06_NO_SILK]  77.72,163.58 180 top
J67  [JST-2-SMD]  106.17,177.8 270 top
J68  [1X06_NO_SILK]  103.63,163.58 180 top
J69  [JST-2-SMD]  132.08,177.8 270 top
J70  [1X06_NO_SILK]  129.54,163.58 180 top
JP1  LED  [SMT-JUMPER_2_NC_TRACE_SILK]  39.62,29.46 180 bottom
JP2  LED  [SMT-JUMPER_2_NC_TRACE_SILK]  13.72,29.46 180 bottom
JP3  LED  [SMT-JUMPER_2_NC_TRACE_SILK]  65.53,29.46 180 bottom
JP4  LED  [SMT-JUMPER_2_NC_TRACE_SILK]  91.44,29.46 180 bottom
JP5  LED  [SMT-JUMPER_2_NC_TRACE_SILK]  117.35,29.46 180 bottom
JP6  LED  [SMT-JUMPER_2_NC_TRACE_SILK]  13.72,55.37 180 bottom
JP7  LED  [SMT-JUMPER_2_NC_TRACE_SILK]  39.62,55.37 180 bottom
JP8  LED  [SMT-JUMPER_2_NC_TRACE_SILK]  65.53,55.37 180 bottom
JP9  LED  [SMT-JUMPER_2_NC_TRACE_SILK]  91.44,55.37 180 bottom
JP10  LED  [SMT-JUMPER_2_NC_TRACE_SILK]  117.35,55.37 180 bottom
JP11  LED  [SMT-JUMPER_2_NC_TRACE_SILK]  13.72,81.28 180 bottom
JP12  LED  [SMT-JUMPER_2_NC_TRACE_SILK]  39.62,81.28 180 bottom
JP13  LED  [SMT-JUMPER_2_NC_TRACE_SILK]  65.53,81.28 180 bottom
JP14  LED  [SMT-JUMPER_2_NC_TRACE_SILK]  91.44,81.28 180 bottom
JP15  LED  [SMT-JUMPER_2_NC_TRACE_SILK]  117.35,81.28 180 bottom
JP16  LED  [SMT-JUMPER_2_NC_TRACE_SILK]  13.72,107.19 180 bottom
JP17  LED  [SMT-JUMPER_2_NC_TRACE_SILK]  39.62,107.19 180 bottom
JP18  LED  [SMT-JUMPER_2_NC_TRACE_SILK]  65.53,107.19 180 bottom
JP19  LED  [SMT-JUMPER_2_NC_TRACE_SILK]  91.44,107.19 180 bottom
JP20  LED  [SMT-JUMPER_2_NC_TRACE_SILK]  117.35,107.19 180 bottom
JP21  LED  [SMT-JUMPER_2_NC_TRACE_SILK]  13.72,133.1 180 bottom
JP22  LED  [SMT-JUMPER_2_NC_TRACE_SILK]  39.62,133.1 180 bottom
JP23  LED  [SMT-JUMPER_2_NC_TRACE_SILK]  65.53,133.1 180 bottom
JP24  LED  [SMT-JUMPER_2_NC_TRACE_SILK]  91.44,133.1 180 bottom
JP25  LED  [SMT-JUMPER_2_NC_TRACE_SILK]  117.35,133.1 180 bottom
JP26  LED  [SMT-JUMPER_2_NC_TRACE_SILK]  13.72,159 180 bottom
JP27  LED  [SMT-JUMPER_2_NC_TRACE_SILK]  39.62,159 180 bottom
JP28  LED  [SMT-JUMPER_2_NC_TRACE_SILK]  65.53,159 180 bottom
JP29  LED  [SMT-JUMPER_2_NC_TRACE_SILK]  91.44,159 180 bottom
JP30  LED  [SMT-JUMPER_2_NC_TRACE_SILK]  117.35,159 180 bottom
JP31  LED  [SMT-JUMPER_2_NC_TRACE_SILK]  13.72,184.91 180 bottom
JP32  LED  [SMT-JUMPER_2_NC_TRACE_SILK]  39.62,184.91 180 bottom
JP33  LED  [SMT-JUMPER_2_NC_TRACE_SILK]  65.53,184.91 180 bottom
JP34  LED  [SMT-JUMPER_2_NC_TRACE_SILK]  91.44,184.91 180 bottom
JP35  LED  [SMT-JUMPER_2_NC_TRACE_SILK]  117.35,184.91 180 bottom
LOGO1  SFE_LOGO_NAME.1_INCH  [SFE_LOGO_NAME_.1]  22.35,29.21 0 bottom
LOGO2  OSHW-LOGOS  [OSHW-LOGO-S]  29.97,26.67 0 bottom
LOGO3  SFE_LOGO_FLAME.1_INCH  [SFE_LOGO_FLAME_.1]  30.99,8.89 0 top
LOGO4  SFE_LOGO_NAME.1_INCH  [SFE_LOGO_NAME_.1]  48.26,29.21 0 bottom
LOGO5  OSHW-LOGOS  [OSHW-LOGO-S]  55.88,26.67 0 bottom
LOGO6  SFE_LOGO_FLAME.1_INCH  [SFE_LOGO_FLAME_.1]  56.9,8.89 0 top
LOGO7  SFE_LOGO_NAME.1_INCH  [SFE_LOGO_NAME_.1]  74.17,29.21 0 bottom
LOGO8  OSHW-LOGOS  [OSHW-LOGO-S]  81.79,26.67 0 bottom
LOGO9  SFE_LOGO_FLAME.1_INCH  [SFE_LOGO_FLAME_.1]  82.8,8.89 0 top
LOGO10  SFE_LOGO_NAME.1_INCH  [SFE_LOGO_NAME_.1]  100.08,29.21 0 bottom
LOGO11  OSHW-LOGOS  [OSHW-LOGO-S]  107.7,26.67 0 bottom
LOGO12  SFE_LOGO_FLAME.1_INCH  [SFE_LOGO_FLAME_.1]  108.71,8.89 0 top
LOGO13  SFE_LOGO_NAME.1_INCH  [SFE_LOGO_NAME_.1]  125.98,29.21 0 bottom
LOGO14  OSHW-LOGOS  [OSHW-LOGO-S]  133.6,26.67 0 bottom
LOGO15  SFE_LOGO_FLAME.1_INCH  [SFE_LOGO_FLAME_.1]  134.62,8.89 0 top
LOGO16  SFE_LOGO_NAME.1_INCH  [SFE_LOGO_NAME_.1]  22.35,55.12 0 bottom
LOGO17  OSHW-LOGOS  [OSHW-LOGO-S]  29.97,52.58 0 bottom
LOGO18  SFE_LOGO_FLAME.1_INCH  [SFE_LOGO_FLAME_.1]  30.99,34.8 0 top
LOGO19  SFE_LOGO_NAME.1_INCH  [SFE_LOGO_NAME_.1]  48.26,55.12 0 bottom
LOGO20  OSHW-LOGOS  [OSHW-LOGO-S]  55.88,52.58 0 bottom
LOGO21  SFE_LOGO_FLAME.1_INCH  [SFE_LOGO_FLAME_.1]  56.9,34.8 0 top
LOGO22  SFE_LOGO_NAME.1_INCH  [SFE_LOGO_NAME_.1]  74.17,55.12 0 bottom
LOGO23  OSHW-LOGOS  [OSHW-LOGO-S]  81.79,52.58 0 bottom
LOGO24  SFE_LOGO_FLAME.1_INCH  [SFE_LOGO_FLAME_.1]  82.8,34.8 0 top
LOGO25  SFE_LOGO_NAME.1_INCH  [SFE_LOGO_NAME_.1]  100.08,55.12 0 bottom
LOGO26  OSHW-LOGOS  [OSHW-LOGO-S]  107.7,52.58 0 bottom
LOGO27  SFE_LOGO_FLAME.1_INCH  [SFE_LOGO_FLAME_.1]  108.71,34.8 0 top
LOGO28  SFE_LOGO_NAME.1_INCH  [SFE_LOGO_NAME_.1]  125.98,55.12 0 bottom
LOGO29  OSHW-LOGOS  [OSHW-LOGO-S]  133.6,52.58 0 bottom
LOGO30  SFE_LOGO_FLAME.1_INCH  [SFE_LOGO_FLAME_.1]  134.62,34.8 0 top
LOGO31  SFE_LOGO_NAME.1_INCH  [SFE_LOGO_NAME_.1]  22.35,81.03 0 bottom
LOGO32  OSHW-LOGOS  [OSHW-LOGO-S]  29.97,78.49 0 bottom
LOGO33  SFE_LOGO_FLAME.1_INCH  [SFE_LOGO_FLAME_.1]  30.99,60.71 0 top
LOGO34  SFE_LOGO_NAME.1_INCH  [SFE_LOGO_NAME_.1]  48.26,81.03 0 bottom
LOGO35  OSHW-LOGOS  [OSHW-LOGO-S]  55.88,78.49 0 bottom
LOGO36  SFE_LOGO_FLAME.1_INCH  [SFE_LOGO_FLAME_.1]  56.9,60.71 0 top
LOGO37  SFE_LOGO_NAME.1_INCH  [SFE_LOGO_NAME_.1]  74.17,81.03 0 bottom
LOGO38  OSHW-LOGOS  [OSHW-LOGO-S]  81.79,78.49 0 bottom
LOGO39  SFE_LOGO_FLAME.1_INCH  [SFE_LOGO_FLAME_.1]  82.8,60.71 0 top
LOGO40  SFE_LOGO_NAME.1_INCH  [SFE_LOGO_NAME_.1]  100.08,81.03 0 bottom
LOGO41  OSHW-LOGOS  [OSHW-LOGO-S]  107.7,78.49 0 bottom
LOGO42  SFE_LOGO_FLAME.1_INCH  [SFE_LOGO_FLAME_.1]  108.71,60.71 0 top
LOGO43  SFE_LOGO_NAME.1_INCH  [SFE_LOGO_NAME_.1]  125.98,81.03 0 bottom
LOGO44  OSHW-LOGOS  [OSHW-LOGO-S]  133.6,78.49 0 bottom
LOGO45  SFE_LOGO_FLAME.1_INCH  [SFE_LOGO_FLAME_.1]  134.62,60.71 0 top
LOGO46  SFE_LOGO_NAME.1_INCH  [SFE_LOGO_NAME_.1]  22.35,106.93 0 bottom
LOGO47  OSHW-LOGOS  [OSHW-LOGO-S]  29.97,104.39 0 bottom
LOGO48  SFE_LOGO_FLAME.1_INCH  [SFE_LOGO_FLAME_.1]  30.99,86.61 0 top
LOGO49  SFE_LOGO_NAME.1_INCH  [SFE_LOGO_NAME_.1]  48.26,106.93 0 bottom
LOGO50  OSHW-LOGOS  [OSHW-LOGO-S]  55.88,104.39 0 bottom
LOGO51  SFE_LOGO_FLAME.1_INCH  [SFE_LOGO_FLAME_.1]  56.9,86.61 0 top
LOGO52  SFE_LOGO_NAME.1_INCH  [SFE_LOGO_NAME_.1]  74.17,106.93 0 bottom
LOGO53  OSHW-LOGOS  [OSHW-LOGO-S]  81.79,104.39 0 bottom
LOGO54  SFE_LOGO_FLAME.1_INCH  [SFE_LOGO_FLAME_.1]  82.8,86.61 0 top
LOGO55  SFE_LOGO_NAME.1_INCH  [SFE_LOGO_NAME_.1]  100.08,106.93 0 bottom
LOGO56  OSHW-LOGOS  [OSHW-LOGO-S]  107.7,104.39 0 bottom
LOGO57  SFE_LOGO_FLAME.1_INCH  [SFE_LOGO_FLAME_.1]  108.71,86.61 0 top
LOGO58  SFE_LOGO_NAME.1_INCH  [SFE_LOGO_NAME_.1]  125.98,106.93 0 bottom
LOGO59  OSHW-LOGOS  [OSHW-LOGO-S]  133.6,104.39 0 bottom
LOGO60  SFE_LOGO_FLAME.1_INCH  [SFE_LOGO_FLAME_.1]  134.62,86.61 0 top
LOGO61  SFE_LOGO_NAME.1_INCH  [SFE_LOGO_NAME_.1]  22.35,132.84 0 bottom
LOGO62  OSHW-LOGOS  [OSHW-LOGO-S]  29.97,130.3 0 bottom
LOGO63  SFE_LOGO_FLAME.1_INCH  [SFE_LOGO_FLAME_.1]  30.99,112.52 0 top
LOGO64  SFE_LOGO_NAME.1_INCH  [SFE_LOGO_NAME_.1]  48.26,132.84 0 bottom
LOGO65  OSHW-LOGOS  [OSHW-LOGO-S]  55.88,130.3 0 bottom
LOGO66  SFE_LOGO_FLAME.1_INCH  [SFE_LOGO_FLAME_.1]  56.9,112.52 0 top
LOGO67  SFE_LOGO_NAME.1_INCH  [SFE_LOGO_NAME_.1]  74.17,132.84 0 bottom
LOGO68  OSHW-LOGOS  [OSHW-LOGO-S]  81.79,130.3 0 bottom
LOGO69  SFE_LOGO_FLAME.1_INCH  [SFE_LOGO_FLAME_.1]  82.8,112.52 0 top
LOGO70  SFE_LOGO_NAME.1_INCH  [SFE_LOGO_NAME_.1]  100.08,132.84 0 bottom
LOGO71  OSHW-LOGOS  [OSHW-LOGO-S]  107.7,130.3 0 bottom
LOGO72  SFE_LOGO_FLAME.1_INCH  [SFE_LOGO_FLAME_.1]  108.71,112.52 0 top
LOGO73  SFE_LOGO_NAME.1_INCH  [SFE_LOGO_NAME_.1]  125.98,132.84 0 bottom
LOGO74  OSHW-LOGOS  [OSHW-LOGO-S]  133.6,130.3 0 bottom
LOGO75  SFE_LOGO_FLAME.1_INCH  [SFE_LOGO_FLAME_.1]  134.62,112.52 0 top
LOGO76  SFE_LOGO_NAME.1_INCH  [SFE_LOGO_NAME_.1]  22.35,158.75 0 bottom
LOGO77  OSHW-LOGOS  [OSHW-LOGO-S]  29.97,156.21 0 bottom
LOGO78  SFE_LOGO_FLAME.1_INCH  [SFE_LOGO_FLAME_.1]  30.99,138.43 0 top
LOGO79  SFE_LOGO_NAME.1_INCH  [SFE_LOGO_NAME_.1]  48.26,158.75 0 bottom
LOGO80  OSHW-LOGOS  [OSHW-LOGO-S]  55.88,156.21 0 bottom
LOGO81  SFE_LOGO_FLAME.1_INCH  [SFE_LOGO_FLAME_.1]  56.9,138.43 0 top
LOGO82  SFE_LOGO_NAME.1_INCH  [SFE_LOGO_NAME_.1]  74.17,158.75 0 bottom
LOGO83  OSHW-LOGOS  [OSHW-LOGO-S]  81.79,156.21 0 bottom
LOGO84  SFE_LOGO_FLAME.1_INCH  [SFE_LOGO_FLAME_.1]  82.8,138.43 0 top
LOGO85  SFE_LOGO_NAME.1_INCH  [SFE_LOGO_NAME_.1]  100.08,158.75 0 bottom
LOGO86  OSHW-LOGOS  [OSHW-LOGO-S]  107.7,156.21 0 bottom
LOGO87  SFE_LOGO_FLAME.1_INCH  [SFE_LOGO_FLAME_.1]  108.71,138.43 0 top
LOGO88  SFE_LOGO_NAME.1_INCH  [SFE_LOGO_NAME_.1]  125.98,158.75 0 bottom
LOGO89  OSHW-LOGOS  [OSHW-LOGO-S]  133.6,156.21 0 bottom
LOGO90  SFE_LOGO_FLAME.1_INCH  [SFE_LOGO_FLAME_.1]  134.62,138.43 0 top
LOGO91  SFE_LOGO_NAME.1_INCH  [SFE_LOGO_NAME_.1]  22.35,184.66 0 bottom
LOGO92  OSHW-LOGOS  [OSHW-LOGO-S]  29.97,182.12 0 bottom
LOGO93  SFE_LOGO_FLAME.1_INCH  [SFE_LOGO_FLAME_.1]  30.99,164.34 0 top
LOGO94  SFE_LOGO_NAME.1_INCH  [SFE_LOGO_NAME_.1]  48.26,184.66 0 bottom
LOGO95  OSHW-LOGOS  [OSHW-LOGO-S]  55.88,182.12 0 bottom
LOGO96  SFE_LOGO_FLAME.1_INCH  [SFE_LOGO_FLAME_.1]  56.9,164.34 0 top
LOGO97  SFE_LOGO_NAME.1_INCH  [SFE_LOGO_NAME_.1]  74.17,184.66 0 bottom
LOGO98  OSHW-LOGOS  [OSHW-LOGO-S]  81.79,182.12 0 bottom
LOGO99  SFE_LOGO_FLAME.1_INCH  [SFE_LOGO_FLAME_.1]  82.8,164.34 0 top
LOGO100  SFE_LOGO_NAME.1_INCH  [SFE_LOGO_NAME_.1]  100.08,184.66 0 bottom
LOGO101  OSHW-LOGOS  [OSHW-LOGO-S]  107.7,182.12 0 bottom
LOGO102  SFE_LOGO_FLAME.1_INCH  [SFE_LOGO_FLAME_.1]  108.71,164.34 0 top
LOGO103  SFE_LOGO_NAME.1_INCH  [SFE_LOGO_NAME_.1]  125.98,184.66 0 bottom
LOGO104  OSHW-LOGOS  [OSHW-LOGO-S]  133.6,182.12 0 bottom
LOGO105  SFE_LOGO_FLAME.1_INCH  [SFE_LOGO_FLAME_.1]  134.62,164.34 0 top
Q1  1.1A/60V/600mΩ  [SOT23-3]  28.45,10.16 270 top
Q2  1.1A/60V/600mΩ  [SOT23-3]  54.36,10.16 270 top
Q3  1.1A/60V/600mΩ  [SOT23-3]  80.26,10.16 270 top
Q4  1.1A/60V/600mΩ  [SOT23-3]  106.17,10.16 270 top
Q5  1.1A/60V/600mΩ  [SOT23-3]  132.08,10.16 270 top
Q6  1.1A/60V/600mΩ  [SOT23-3]  28.45,36.07 270 top
Q7  1.1A/60V/600mΩ  [SOT23-3]  54.36,36.07 270 top
Q8  1.1A/60V/600mΩ  [SOT23-3]  80.26,36.07 270 top
Q9  1.1A/60V/600mΩ  [SOT23-3]  106.17,36.07 270 top
Q10  1.1A/60V/600mΩ  [SOT23-3]  132.08,36.07 270 top
Q11  1.1A/60V/600mΩ  [SOT23-3]  28.45,61.98 270 top
Q12  1.1A/60V/600mΩ  [SOT23-3]  54.36,61.98 270 top
Q13  1.1A/60V/600mΩ  [SOT23-3]  80.26,61.98 270 top
Q14  1.1A/60V/600mΩ  [SOT23-3]  106.17,61.98 270 top
Q15  1.1A/60V/600mΩ  [SOT23-3]  132.08,61.98 270 top
Q16  1.1A/60V/600mΩ  [SOT23-3]  28.45,87.88 270 top
Q17  1.1A/60V/600mΩ  [SOT23-3]  54.36,87.88 270 top
Q18  1.1A/60V/600mΩ  [SOT23-3]  80.26,87.88 270 top
Q19  1.1A/60V/600mΩ  [SOT23-3]  106.17,87.88 270 top
Q20  1.1A/60V/600mΩ  [SOT23-3]  132.08,87.88 270 top
Q21  1.1A/60V/600mΩ  [SOT23-3]  28.45,113.79 270 top
Q22  1.1A/60V/600mΩ  [SOT23-3]  54.36,113.79 270 top
Q23  1.1A/60V/600mΩ  [SOT23-3]  80.26,113.79 270 top
Q24  1.1A/60V/600mΩ  [SOT23-3]  106.17,113.79 270 top
Q25  1.1A/60V/600mΩ  [SOT23-3]  132.08,113.79 270 top
Q26  1.1A/60V/600mΩ  [SOT23-3]  28.45,139.7 270 top
Q27  1.1A/60V/600mΩ  [SOT23-3]  54.36,139.7 270 top
Q28  1.1A/60V/600mΩ  [SOT23-3]  80.26,139.7 270 top
Q29  1.1A/60V/600mΩ  [SOT23-3]  106.17,139.7 270 top
Q30  1.1A/60V/600mΩ  [SOT23-3]  132.08,139.7 270 top
Q31  1.1A/60V/600mΩ  [SOT23-3]  28.45,165.61 270 top
Q32  1.1A/60V/600mΩ  [SOT23-3]  54.36,165.61 270 top
Q33  1.1A/60V/600mΩ  [SOT23-3]  80.26,165.61 270 top
Q34  1.1A/60V/600mΩ  [SOT23-3]  106.17,165.61 270 top
Q35  1.1A/60V/600mΩ  [SOT23-3]  132.08,165.61 270 top
R1  16.2k  [0603]  26.14,30.23 90 top
R2  22k  [0603]  24.64,30.23 90 top
R3  93.1k  [0603]  23.11,30.23 90 top
R4  124k  [0603]  21.59,30.23 90 top
R5  169K  [0603]  20.07,30.23 90 top
R6  330  [0603]  13.69,31.14 0 top
R7  [0603]  17.27,30.23 270 top
R8  [AXIAL-0.3]  21.34,21.84 90 top
R9  16.2k  [0603]  52.04,30.23 90 top
R10  22k  [0603]  50.55,30.23 90 top
R11  124k  [0603]  47.5,30.23 90 top
R12  169K  [0603]  45.97,30.23 90 top
R13  330  [0603]  39.6,31.14 0 top
R14  [0603]  43.18,30.23 270 top
R15  [AXIAL-0.3]  47.24,21.84 90 top
R16  93.1k  [0603]  49.02,30.23 90 top
R17  16.2k  [0603]  77.95,30.23 90 top
R18  22k  [0603]  76.45,30.23 90 top
R19  124k  [0603]  73.41,30.23 90 top
R20  169K  [0603]  71.88,30.23 90 top
R21  330  [0603]  65.51,31.14 0 top
R22  [0603]  69.09,30.23 270 top
R23  [AXIAL-0.3]  73.15,21.84 90 top
R24  93.1k  [0603]  74.93,30.23 90 top
R25  16.2k  [0603]  103.86,30.23 90 top
R26  22k  [0603]  102.36,30.23 90 top
R27  124k  [0603]  99.31,30.23 90 top
R28  169K  [0603]  97.79,30.23 90 top
R29  330  [0603]  91.41,31.14 0 top
R30  [0603]  95,30.23 270 top
R31  [AXIAL-0.3]  99.06,21.84 90 top
R32  93.1k  [0603]  100.84,30.23 90 top
R33  16.2k  [0603]  129.77,30.23 90 top
R34  22k  [0603]  128.27,30.23 90 top
R35  124k  [0603]  125.22,30.23 90 top
R36  169K  [0603]  123.7,30.23 90 top
R37  330  [0603]  117.32,31.14 0 top
R38  [0603]  120.9,30.23 270 top
R39  [AXIAL-0.3]  124.97,21.84 90 top
R40  93.1k  [0603]  126.75,30.23 90 top
R41  16.2k  [0603]  26.14,56.13 90 top
R42  22k  [0603]  24.64,56.13 90 top
R43  124k  [0603]  21.59,56.13 90 top
R44  169K  [0603]  20.07,56.13 90 top
R45  330  [0603]  13.69,57.05 0 top
R46  [0603]  17.27,56.13 270 top
R47  [AXIAL-0.3]  21.34,47.75 90 top
R48  93.1k  [0603]  23.11,56.13 90 top
R49  16.2k  [0603]  52.04,56.13 90 top
R50  22k  [0603]  50.55,56.13 90 top
R51  124k  [0603]  47.5,56.13 90 top
R52  169K  [0603]  45.97,56.13 90 top
R53  330  [0603]  39.6,57.05 0 top
R54  [0603]  43.18,56.13 270 top
R55  [AXIAL-0.3]  47.24,47.75 90 top
R56  93.1k  [0603]  49.02,56.13 90 top
R57  16.2k  [0603]  77.95,56.13 90 top
R58  22k  [0603]  76.45,56.13 90 top
R59  124k  [0603]  73.41,56.13 90 top
R60  169K  [0603]  71.88,56.13 90 top
R61  330  [0603]  65.51,57.05 0 top
R62  [0603]  69.09,56.13 270 top
R63  [AXIAL-0.3]  73.15,47.75 90 top
R64  93.1k  [0603]  74.93,56.13 90 top
R65  16.2k  [0603]  103.86,56.13 90 top
R66  22k  [0603]  102.36,56.13 90 top
R67  124k  [0603]  99.31,56.13 90 top
R68  169K  [0603]  97.79,56.13 90 top
R69  330  [0603]  91.41,57.05 0 top
R70  [0603]  95,56.13 270 top
R71  [AXIAL-0.3]  99.06,47.75 90 top
R72  93.1k  [0603]  100.84,56.13 90 top
R73  16.2k  [0603]  129.77,56.13 90 top
R74  22k  [0603]  128.27,56.13 90 top
R75  124k  [0603]  125.22,56.13 90 top
R76  169K  [0603]  123.7,56.13 90 top
R77  330  [0603]  117.32,57.05 0 top
R78  [0603]  120.9,56.13 270 top
R79  [AXIAL-0.3]  124.97,47.75 90 top
R80  93.1k  [0603]  126.75,56.13 90 top
R81  16.2k  [0603]  26.14,82.04 90 top
R82  22k  [0603]  24.64,82.04 90 top
R83  124k  [0603]  21.59,82.04 90 top
R84  169K  [0603]  20.07,82.04 90 top
R85  330  [0603]  13.69,82.96 0 top
R86  [0603]  17.27,82.04 270 top
R87  [AXIAL-0.3]  21.34,73.66 90 top
R88  93.1k  [0603]  23.11,82.04 90 top
R89  16.2k  [0603]  52.04,82.04 90 top
R90  22k  [0603]  50.55,82.04 90 top
R91  124k  [0603]  47.5,82.04 90 top
R92  169K  [0603]  45.97,82.04 90 top
R93  330  [0603]  39.6,82.96 0 top
R94  [0603]  43.18,82.04 270 top
R95  [AXIAL-0.3]  47.24,73.66 90 top
R96  93.1k  [0603]  49.02,82.04 90 top
R97  16.2k  [0603]  77.95,82.04 90 top
R98  22k  [0603]  76.45,82.04 90 top
R99  124k  [0603]  73.41,82.04 90 top
R100  169K  [0603]  71.88,82.04 90 top
R101  330  [0603]  65.51,82.96 0 top
R102  [0603]  69.09,82.04 270 top
R103  [AXIAL-0.3]  73.15,73.66 90 top
R104  93.1k  [0603]  74.93,82.04 90 top
R105  16.2k  [0603]  103.86,82.04 90 top
R106  22k  [0603]  102.36,82.04 90 top
R107  124k  [0603]  99.31,82.04 90 top
R108  169K  [0603]  97.79,82.04 90 top
R109  330  [0603]  91.41,82.96 0 top
R110  [0603]  95,82.04 270 top
R111  [AXIAL-0.3]  99.06,73.66 90 top
R112  93.1k  [0603]  100.84,82.04 90 top
R113  16.2k  [0603]  129.77,82.04 90 top
R114  22k  [0603]  128.27,82.04 90 top
R115  124k  [0603]  125.22,82.04 90 top
R116  169K  [0603]  123.7,82.04 90 top
R117  330  [0603]  117.32,82.96 0 top
R118  [0603]  120.9,82.04 270 top
R119  [AXIAL-0.3]  124.97,73.66 90 top
R120  93.1k  [0603]  126.75,82.04 90 top
R121  16.2k  [0603]  26.14,107.95 90 top
R122  22k  [0603]  24.64,107.95 90 top
R123  124k  [0603]  21.59,107.95 90 top
R124  169K  [0603]  20.07,107.95 90 top
R125  330  [0603]  13.69,108.86 0 top
R126  [0603]  17.27,107.95 270 top
R127  [AXIAL-0.3]  21.34,99.57 90 top
R128  93.1k  [0603]  23.11,107.95 90 top
R129  16.2k  [0603]  52.04,107.95 90 top
R130  22k  [0603]  50.55,107.95 90 top
R131  124k  [0603]  47.5,107.95 90 top
R132  169K  [0603]  45.97,107.95 90 top
R133  330  [0603]  39.6,108.86 0 top
R134  [0603]  43.18,107.95 270 top
R135  [AXIAL-0.3]  47.24,99.57 90 top
R136  93.1k  [0603]  49.02,107.95 90 top
R137  16.2k  [0603]  77.95,107.95 90 top
R138  22k  [0603]  76.45,107.95 90 top
R139  124k  [0603]  73.41,107.95 90 top
R140  169K  [0603]  71.88,107.95 90 top
R141  330  [0603]  65.51,108.86 0 top
R142  [0603]  69.09,107.95 270 top
R143  [AXIAL-0.3]  73.15,99.57 90 top
R144  93.1k  [0603]  74.93,107.95 90 top
R145  16.2k  [0603]  103.86,107.95 90 top
R146  22k  [0603]  102.36,107.95 90 top
R147  124k  [0603]  99.31,107.95 90 top
R148  169K  [0603]  97.79,107.95 90 top
R149  330  [0603]  91.41,108.86 0 top
R150  [0603]  95,107.95 270 top
R151  [AXIAL-0.3]  99.06,99.57 90 top
R152  93.1k  [0603]  100.84,107.95 90 top
R153  16.2k  [0603]  129.77,107.95 90 top
R154  22k  [0603]  128.27,107.95 90 top
R155  124k  [0603]  125.22,107.95 90 top
R156  169K  [0603]  123.7,107.95 90 top
R157  330  [0603]  117.32,108.86 0 top
R158  [0603]  120.9,107.95 270 top
R159  [AXIAL-0.3]  124.97,99.57 90 top
R160  93.1k  [0603]  126.75,107.95 90 top
R161  16.2k  [0603]  26.14,133.86 90 top
R162  22k  [0603]  24.64,133.86 90 top
R163  124k  [0603]  21.59,133.86 90 top
R164  169K  [0603]  20.07,133.86 90 top
R165  330  [0603]  13.69,134.77 0 top
R166  [0603]  17.27,133.86 270 top
R167  [AXIAL-0.3]  21.34,125.48 90 top
R168  93.1k  [0603]  23.11,133.86 90 top
R169  16.2k  [0603]  52.04,133.86 90 top
R170  22k  [0603]  50.55,133.86 90 top
R171  124k  [0603]  47.5,133.86 90 top
R172  169K  [0603]  45.97,133.86 90 top
R173  330  [0603]  39.6,134.77 0 top
R174  [0603]  43.18,133.86 270 top
R175  [AXIAL-0.3]  47.24,125.48 90 top
R176  93.1k  [0603]  49.02,133.86 90 top
R177  16.2k  [0603]  77.95,133.86 90 top
R178  22k  [0603]  76.45,133.86 90 top
R179  124k  [0603]  73.41,133.86 90 top
R180  169K  [0603]  71.88,133.86 90 top
R181  330  [0603]  65.51,134.77 0 top
R182  [0603]  69.09,133.86 270 top
R183  [AXIAL-0.3]  73.15,125.48 90 top
R184  93.1k  [0603]  74.93,133.86 90 top
R185  16.2k  [0603]  103.86,133.86 90 top
R186  22k  [0603]  102.36,133.86 90 top
R187  124k  [0603]  99.31,133.86 90 top
R188  169K  [0603]  97.79,133.86 90 top
R189  330  [0603]  91.41,134.77 0 top
R190  [0603]  95,133.86 270 top
R191  [AXIAL-0.3]  99.06,125.48 90 top
R192  93.1k  [0603]  100.84,133.86 90 top
R193  16.2k  [0603]  129.77,133.86 90 top
R194  22k  [0603]  128.27,133.86 90 top
R195  124k  [0603]  125.22,133.86 90 top
R196  169K  [0603]  123.7,133.86 90 top
R197  330  [0603]  117.32,134.77 0 top
R198  [0603]  120.9,133.86 270 top
R199  [AXIAL-0.3]  124.97,125.48 90 top
R200  93.1k  [0603]  126.75,133.86 90 top
R201  16.2k  [0603]  26.14,159.77 90 top
R202  22k  [0603]  24.64,159.77 90 top
R203  124k  [0603]  21.59,159.77 90 top
R204  169K  [0603]  20.07,159.77 90 top
R205  330  [0603]  13.69,160.68 0 top
R206  [0603]  17.27,159.77 270 top
R207  [AXIAL-0.3]  21.34,151.38 90 top
R208  93.1k  [0603]  23.11,159.77 90 top
R209  16.2k  [0603]  52.04,159.77 90 top
R210  22k  [0603]  50.55,159.77 90 top
R211  124k  [0603]  47.5,159.77 90 top
R212  169K  [0603]  45.97,159.77 90 top
R213  330  [0603]  39.6,160.68 0 top
R214  [0603]  43.18,159.77 270 top
R215  [AXIAL-0.3]  47.24,151.38 90 top
R216  93.1k  [0603]  49.02,159.77 90 top
R217  16.2k  [0603]  77.95,159.77 90 top
R218  22k  [0603]  76.45,159.77 90 top
R219  124k  [0603]  73.41,159.77 90 top
R220  169K  [0603]  71.88,159.77 90 top
R221  330  [0603]  65.51,160.68 0 top
R222  [0603]  69.09,159.77 270 top
R223  [AXIAL-0.3]  73.15,151.38 90 top
R224  93.1k  [0603]  74.93,159.77 90 top
R225  16.2k  [0603]  103.86,159.77 90 top
R226  22k  [0603]  102.36,159.77 90 top
R227  124k  [0603]  99.31,159.77 90 top
R228  169K  [0603]  97.79,159.77 90 top
R229  330  [0603]  91.41,160.68 0 top
R230  [0603]  95,159.77 270 top
R231  [AXIAL-0.3]  99.06,151.38 90 top
R232  93.1k  [0603]  100.84,159.77 90 top
R233  16.2k  [0603]  129.77,159.77 90 top
R234  22k  [0603]  128.27,159.77 90 top
R235  124k  [0603]  125.22,159.77 90 top
R236  169K  [0603]  123.7,159.77 90 top
R237  330  [0603]  117.32,160.68 0 top
R238  [0603]  120.9,159.77 270 top
R239  [AXIAL-0.3]  124.97,151.38 90 top
R240  93.1k  [0603]  126.75,159.77 90 top
R241  16.2k  [0603]  26.14,185.67 90 top
R242  22k  [0603]  24.64,185.67 90 top
R243  124k  [0603]  21.59,185.67 90 top
R244  169K  [0603]  20.07,185.67 90 top
R245  330  [0603]  13.69,186.59 0 top
R246  [0603]  17.27,185.67 270 top
R247  [AXIAL-0.3]  21.34,177.29 90 top
R248  93.1k  [0603]  23.11,185.67 90 top
R249  16.2k  [0603]  52.04,185.67 90 top
R250  22k  [0603]  50.55,185.67 90 top
R251  124k  [0603]  47.5,185.67 90 top
R252  169K  [0603]  45.97,185.67 90 top
R253  330  [0603]  39.6,186.59 0 top
R254  [0603]  43.18,185.67 270 top
R255  [AXIAL-0.3]  47.24,177.29 90 top
R256  93.1k  [0603]  49.02,185.67 90 top
R257  16.2k  [0603]  77.95,185.67 90 top
R258  22k  [0603]  76.45,185.67 90 top
R259  124k  [0603]  73.41,185.67 90 top
R260  169K  [0603]  71.88,185.67 90 top
R261  330  [0603]  65.51,186.59 0 top
R262  [0603]  69.09,185.67 270 top
R263  [AXIAL-0.3]  73.15,177.29 90 top
R264  93.1k  [0603]  74.93,185.67 90 top
R265  16.2k  [0603]  103.86,185.67 90 top
R266  22k  [0603]  102.36,185.67 90 top
R267  124k  [0603]  99.31,185.67 90 top
R268  169K  [0603]  97.79,185.67 90 top
R269  330  [0603]  91.41,186.59 0 top
R270  [0603]  95,185.67 270 top
R271  [AXIAL-0.3]  99.06,177.29 90 top
R272  93.1k  [0603]  100.84,185.67 90 top
R273  16.2k  [0603]  129.77,185.67 90 top
R274  22k  [0603]  128.27,185.67 90 top
R275  124k  [0603]  125.22,185.67 90 top
R276  169K  [0603]  123.7,185.67 90 top
R277  330  [0603]  117.32,186.59 0 top
R278  [0603]  120.9,185.67 270 top
R279  [AXIAL-0.3]  124.97,177.29 90 top
R280  93.1k  [0603]  126.75,185.67 90 top
S1  MOMENTARY-SWITCH-SPST-SMD-5.2MM-TALL  [TACTILE_SWITCH_SMD_5.2MM]  27.91,14.94 0 top
S2  MOMENTARY-SWITCH-SPST-SMD-5.2MM-TALL  [TACTILE_SWITCH_SMD_5.2MM]  53.82,14.94 0 top
S3  MOMENTARY-SWITCH-SPST-SMD-5.2MM-TALL  [TACTILE_SWITCH_SMD_5.2MM]  79.73,14.94 0 top
S4  MOMENTARY-SWITCH-SPST-SMD-5.2MM-TALL  [TACTILE_SWITCH_SMD_5.2MM]  105.64,14.94 0 top
S5  MOMENTARY-SWITCH-SPST-SMD-5.2MM-TALL  [TACTILE_SWITCH_SMD_5.2MM]  131.55,14.94 0 top
S6  MOMENTARY-SWITCH-SPST-SMD-5.2MM-TALL  [TACTILE_SWITCH_SMD_5.2MM]  27.91,40.84 0 top
S7  MOMENTARY-SWITCH-SPST-SMD-5.2MM-TALL  [TACTILE_SWITCH_SMD_5.2MM]  53.82,40.84 0 top
S8  MOMENTARY-SWITCH-SPST-SMD-5.2MM-TALL  [TACTILE_SWITCH_SMD_5.2MM]  79.73,40.84 0 top
S9  MOMENTARY-SWITCH-SPST-SMD-5.2MM-TALL  [TACTILE_SWITCH_SMD_5.2MM]  105.64,40.84 0 top
S10  MOMENTARY-SWITCH-SPST-SMD-5.2MM-TALL  [TACTILE_SWITCH_SMD_5.2MM]  131.55,40.84 0 top
S11  MOMENTARY-SWITCH-SPST-SMD-5.2MM-TALL  [TACTILE_SWITCH_SMD_5.2MM]  27.91,66.75 0 top
S12  MOMENTARY-SWITCH-SPST-SMD-5.2MM-TALL  [TACTILE_SWITCH_SMD_5.2MM]  53.82,66.75 0 top
S13  MOMENTARY-SWITCH-SPST-SMD-5.2MM-TALL  [TACTILE_SWITCH_SMD_5.2MM]  79.73,66.75 0 top
S14  MOMENTARY-SWITCH-SPST-SMD-5.2MM-TALL  [TACTILE_SWITCH_SMD_5.2MM]  105.64,66.75 0 top
S15  MOMENTARY-SWITCH-SPST-SMD-5.2MM-TALL  [TACTILE_SWITCH_SMD_5.2MM]  131.55,66.75 0 top
S16  MOMENTARY-SWITCH-SPST-SMD-5.2MM-TALL  [TACTILE_SWITCH_SMD_5.2MM]  27.91,92.66 0 top
S17  MOMENTARY-SWITCH-SPST-SMD-5.2MM-TALL  [TACTILE_SWITCH_SMD_5.2MM]  53.82,92.66 0 top
S18  MOMENTARY-SWITCH-SPST-SMD-5.2MM-TALL  [TACTILE_SWITCH_SMD_5.2MM]  79.73,92.66 0 top
S19  MOMENTARY-SWITCH-SPST-SMD-5.2MM-TALL  [TACTILE_SWITCH_SMD_5.2MM]  105.64,92.66 0 top
S20  MOMENTARY-SWITCH-SPST-SMD-5.2MM-TALL  [TACTILE_SWITCH_SMD_5.2MM]  131.55,92.66 0 top
S21  MOMENTARY-SWITCH-SPST-SMD-5.2MM-TALL  [TACTILE_SWITCH_SMD_5.2MM]  27.91,118.57 0 top
S22  MOMENTARY-SWITCH-SPST-SMD-5.2MM-TALL  [TACTILE_SWITCH_SMD_5.2MM]  53.82,118.57 0 top
S23  MOMENTARY-SWITCH-SPST-SMD-5.2MM-TALL  [TACTILE_SWITCH_SMD_5.2MM]  79.73,118.57 0 top
S24  MOMENTARY-SWITCH-SPST-SMD-5.2MM-TALL  [TACTILE_SWITCH_SMD_5.2MM]  105.64,118.57 0 top
S25  MOMENTARY-SWITCH-SPST-SMD-5.2MM-TALL  [TACTILE_SWITCH_SMD_5.2MM]  131.55,118.57 0 top
S26  MOMENTARY-SWITCH-SPST-SMD-5.2MM-TALL  [TACTILE_SWITCH_SMD_5.2MM]  27.91,144.48 0 top
S27  MOMENTARY-SWITCH-SPST-SMD-5.2MM-TALL  [TACTILE_SWITCH_SMD_5.2MM]  53.82,144.48 0 top
S28  MOMENTARY-SWITCH-SPST-SMD-5.2MM-TALL  [TACTILE_SWITCH_SMD_5.2MM]  79.73,144.48 0 top
S29  MOMENTARY-SWITCH-SPST-SMD-5.2MM-TALL  [TACTILE_SWITCH_SMD_5.2MM]  105.64,144.48 0 top
S30  MOMENTARY-SWITCH-SPST-SMD-5.2MM-TALL  [TACTILE_SWITCH_SMD_5.2MM]  131.55,144.48 0 top
S31  MOMENTARY-SWITCH-SPST-SMD-5.2MM-TALL  [TACTILE_SWITCH_SMD_5.2MM]  27.91,170.38 0 top
S32  MOMENTARY-SWITCH-SPST-SMD-5.2MM-TALL  [TACTILE_SWITCH_SMD_5.2MM]  53.82,170.38 0 top
S33  MOMENTARY-SWITCH-SPST-SMD-5.2MM-TALL  [TACTILE_SWITCH_SMD_5.2MM]  79.73,170.38 0 top
S34  MOMENTARY-SWITCH-SPST-SMD-5.2MM-TALL  [TACTILE_SWITCH_SMD_5.2MM]  105.64,170.38 0 top
S35  MOMENTARY-SWITCH-SPST-SMD-5.2MM-TALL  [TACTILE_SWITCH_SMD_5.2MM]  131.55,170.38 0 top
SW1  DIP-06  [DIPSWITCH-06-SMD]  14.22,19.56 270 top
SW2  DIP-06  [DIPSWITCH-06-SMD]  40.13,19.56 270 top
SW3  DIP-06  [DIPSWITCH-06-SMD]  66.04,19.56 270 top
SW4  DIP-06  [DIPSWITCH-06-SMD]  91.95,19.56 270 top
SW5  DIP-06  [DIPSWITCH-06-SMD]  117.86,19.56 270 top
SW6  DIP-06  [DIPSWITCH-06-SMD]  14.22,45.47 270 top
SW7  DIP-06  [DIPSWITCH-06-SMD]  40.13,45.47 270 top
SW8  DIP-06  [DIPSWITCH-06-SMD]  66.04,45.47 270 top
SW9  DIP-06  [DIPSWITCH-06-SMD]  91.95,45.47 270 top
SW10  DIP-06  [DIPSWITCH-06-SMD]  117.86,45.47 270 top
SW11  DIP-06  [DIPSWITCH-06-SMD]  14.22,71.37 270 top
SW12  DIP-06  [DIPSWITCH-06-SMD]  40.13,71.37 270 top
SW13  DIP-06  [DIPSWITCH-06-SMD]  66.04,71.37 270 top
SW14  DIP-06  [DIPSWITCH-06-SMD]  91.95,71.37 270 top
SW15  DIP-06  [DIPSWITCH-06-SMD]  117.86,71.37 270 top
SW16  DIP-06  [DIPSWITCH-06-SMD]  14.22,97.28 270 top
SW17  DIP-06  [DIPSWITCH-06-SMD]  40.13,97.28 270 top
SW18  DIP-06  [DIPSWITCH-06-SMD]  66.04,97.28 270 top
SW19  DIP-06  [DIPSWITCH-06-SMD]  91.95,97.28 270 top
SW20  DIP-06  [DIPSWITCH-06-SMD]  117.86,97.28 270 top
SW21  DIP-06  [DIPSWITCH-06-SMD]  14.22,123.19 270 top
SW22  DIP-06  [DIPSWITCH-06-SMD]  40.13,123.19 270 top
SW23  DIP-06  [DIPSWITCH-06-SMD]  66.04,123.19 270 top
SW24  DIP-06  [DIPSWITCH-06-SMD]  91.95,123.19 270 top
SW25  DIP-06  [DIPSWITCH-06-SMD]  117.86,123.19 270 top
SW26  DIP-06  [DIPSWITCH-06-SMD]  14.22,149.1 270 top
SW27  DIP-06  [DIPSWITCH-06-SMD]  40.13,149.1 270 top
SW28  DIP-06  [DIPSWITCH-06-SMD]  66.04,149.1 270 top
SW29  DIP-06  [DIPSWITCH-06-SMD]  91.95,149.1 270 top
SW30  DIP-06  [DIPSWITCH-06-SMD]  117.86,149.1 270 top
SW31  DIP-06  [DIPSWITCH-06-SMD]  14.22,175.01 270 top
SW32  DIP-06  [DIPSWITCH-06-SMD]  40.13,175.01 270 top
SW33  DIP-06  [DIPSWITCH-06-SMD]  66.04,175.01 270 top
SW34  DIP-06  [DIPSWITCH-06-SMD]  91.95,175.01 270 top
SW35  DIP-06  [DIPSWITCH-06-SMD]  117.86,175.01 270 top
U1  TPL5110  [SOT23-6]  21.97,13.92 0 top
U2  TPL5110  [SOT23-6]  47.88,13.92 0 top
U3  TPL5110  [SOT23-6]  73.79,13.92 0 top
U4  TPL5110  [SOT23-6]  99.7,13.92 0 top
U5  TPL5110  [SOT23-6]  125.6,13.92 0 top
U6  TPL5110  [SOT23-6]  21.97,39.83 0 top
U7  TPL5110  [SOT23-6]  47.88,39.83 0 top
U8  TPL5110  [SOT23-6]  73.79,39.83 0 top
U9  TPL5110  [SOT23-6]  99.7,39.83 0 top
U10  TPL5110  [SOT23-6]  125.6,39.83 0 top
U11  TPL5110  [SOT23-6]  21.97,65.74 0 top
U12  TPL5110  [SOT23-6]  47.88,65.74 0 top
U13  TPL5110  [SOT23-6]  73.79,65.74 0 top
U14  TPL5110  [SOT23-6]  99.7,65.74 0 top
U15  TPL5110  [SOT23-6]  125.6,65.74 0 top
U16  TPL5110  [SOT23-6]  21.97,91.64 0 top
U17  TPL5110  [SOT23-6]  47.88,91.64 0 top
U18  TPL5110  [SOT23-6]  73.79,91.64 0 top
U19  TPL5110  [SOT23-6]  99.7,91.64 0 top
U20  TPL5110  [SOT23-6]  125.6,91.64 0 top
U21  TPL5110  [SOT23-6]  21.97,117.55 0 top
U22  TPL5110  [SOT23-6]  47.88,117.55 0 top
U23  TPL5110  [SOT23-6]  73.79,117.55 0 top
U24  TPL5110  [SOT23-6]  99.7,117.55 0 top
U25  TPL5110  [SOT23-6]  125.6,117.55 0 top
U26  TPL5110  [SOT23-6]  21.97,143.46 0 top
U27  TPL5110  [SOT23-6]  47.88,143.46 0 top
U28  TPL5110  [SOT23-6]  73.79,143.46 0 top
U29  TPL5110  [SOT23-6]  99.7,143.46 0 top
U30  TPL5110  [SOT23-6]  125.6,143.46 0 top
U31  TPL5110  [SOT23-6]  21.97,169.37 0 top
U32  TPL5110  [SOT23-6]  47.88,169.37 0 top
U33  TPL5110  [SOT23-6]  73.79,169.37 0 top
U34  TPL5110  [SOT23-6]  99.7,169.37 0 top
U35  TPL5110  [SOT23-6]  125.6,169.37 0 top
U$1  [DONE0]  18.29,8.53 90 bottom
U$2  [GND-03]  25.93,8.48 90 bottom
U$3  [VOUT0]  23.37,8.48 90 bottom
U$4  [GND-03]  20.88,8.48 90 bottom
U$5  [VDD0]  13.21,8.64 90 bottom
U$6  [NANO_POWER0]  30.73,12.95 90 bottom
U$7  [SWITCH0]  28.7,15.75 90 bottom